# EAGLE board xmosio2_routed (EAGLE 7.6.0), part 1 of 2
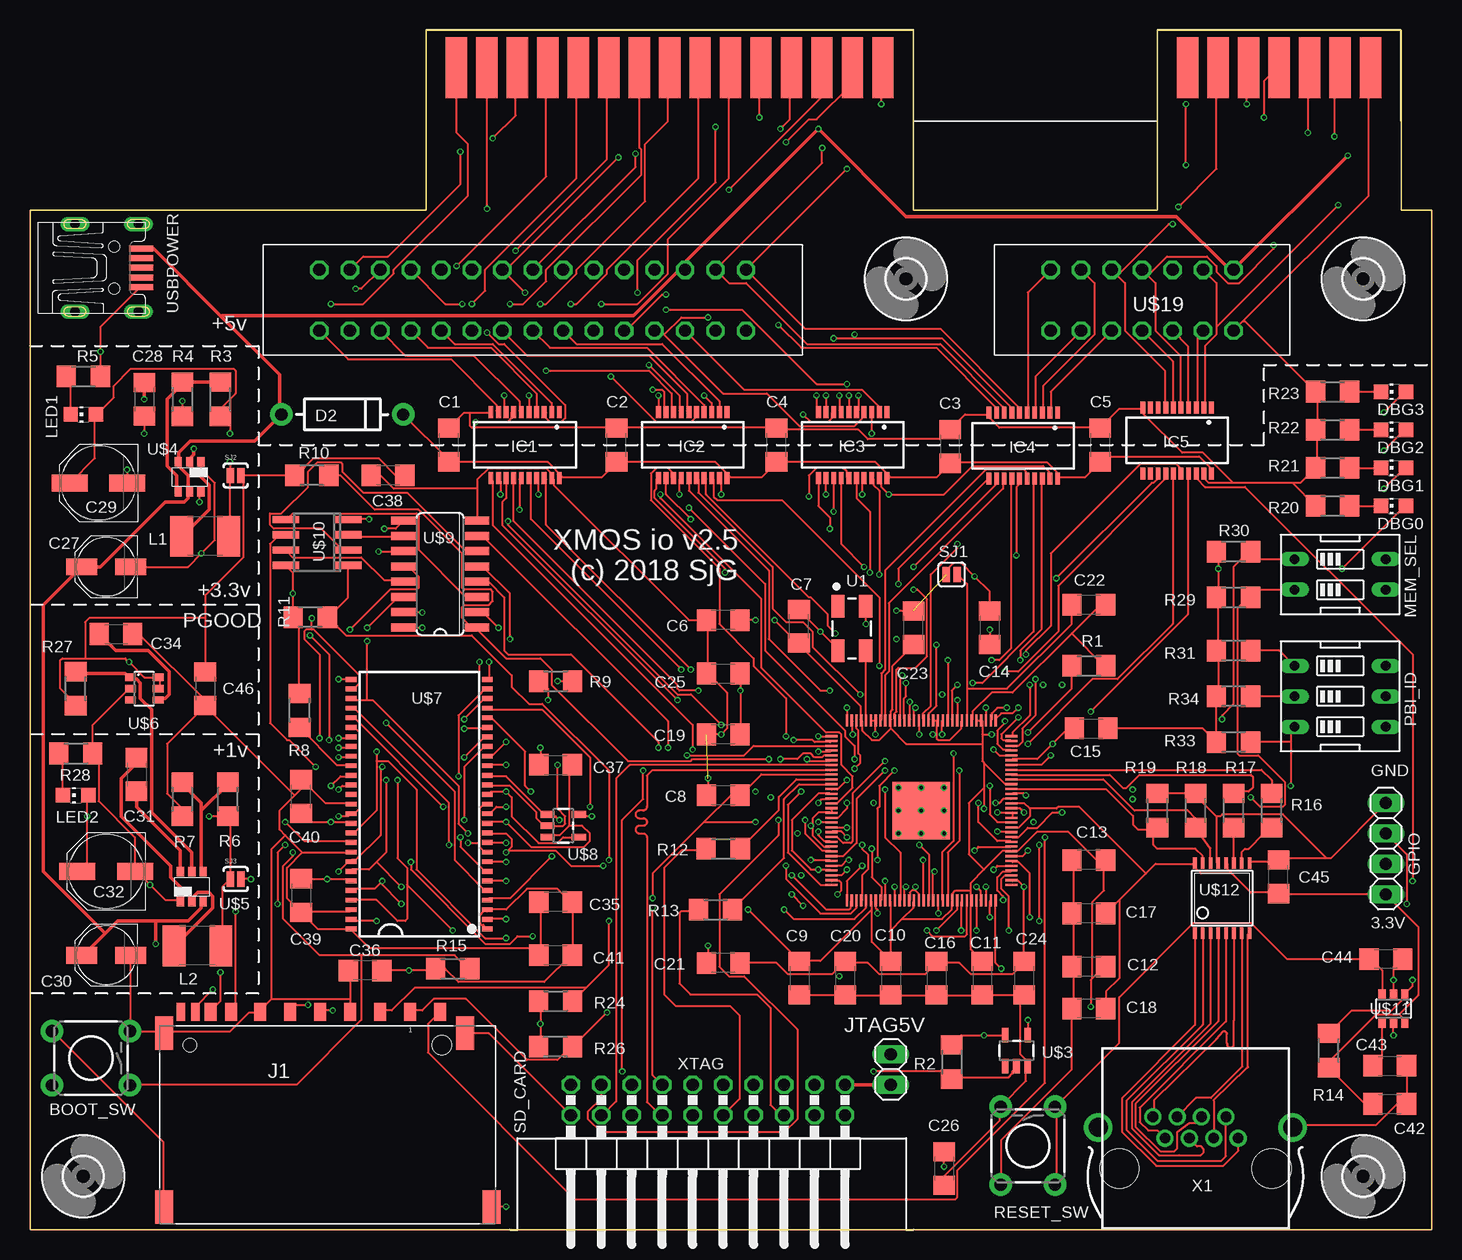
[diagram p0: board, top side]
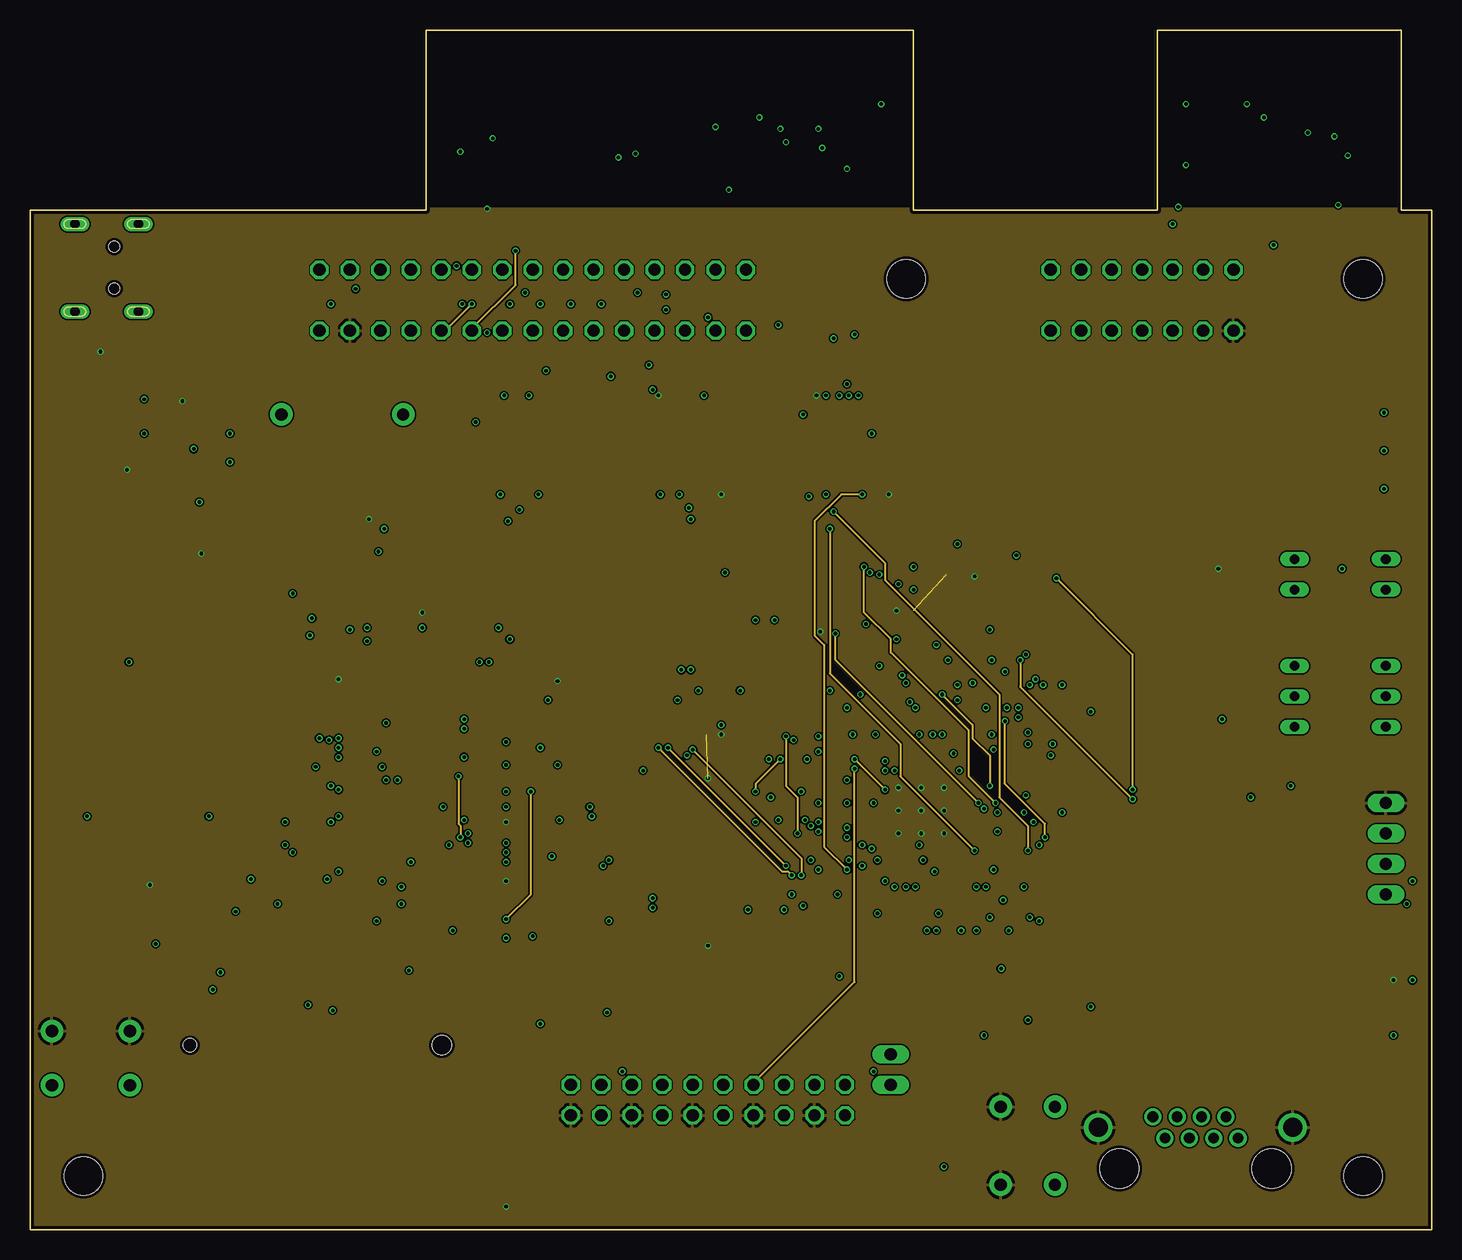
[diagram p1: board, inner layer Route2]
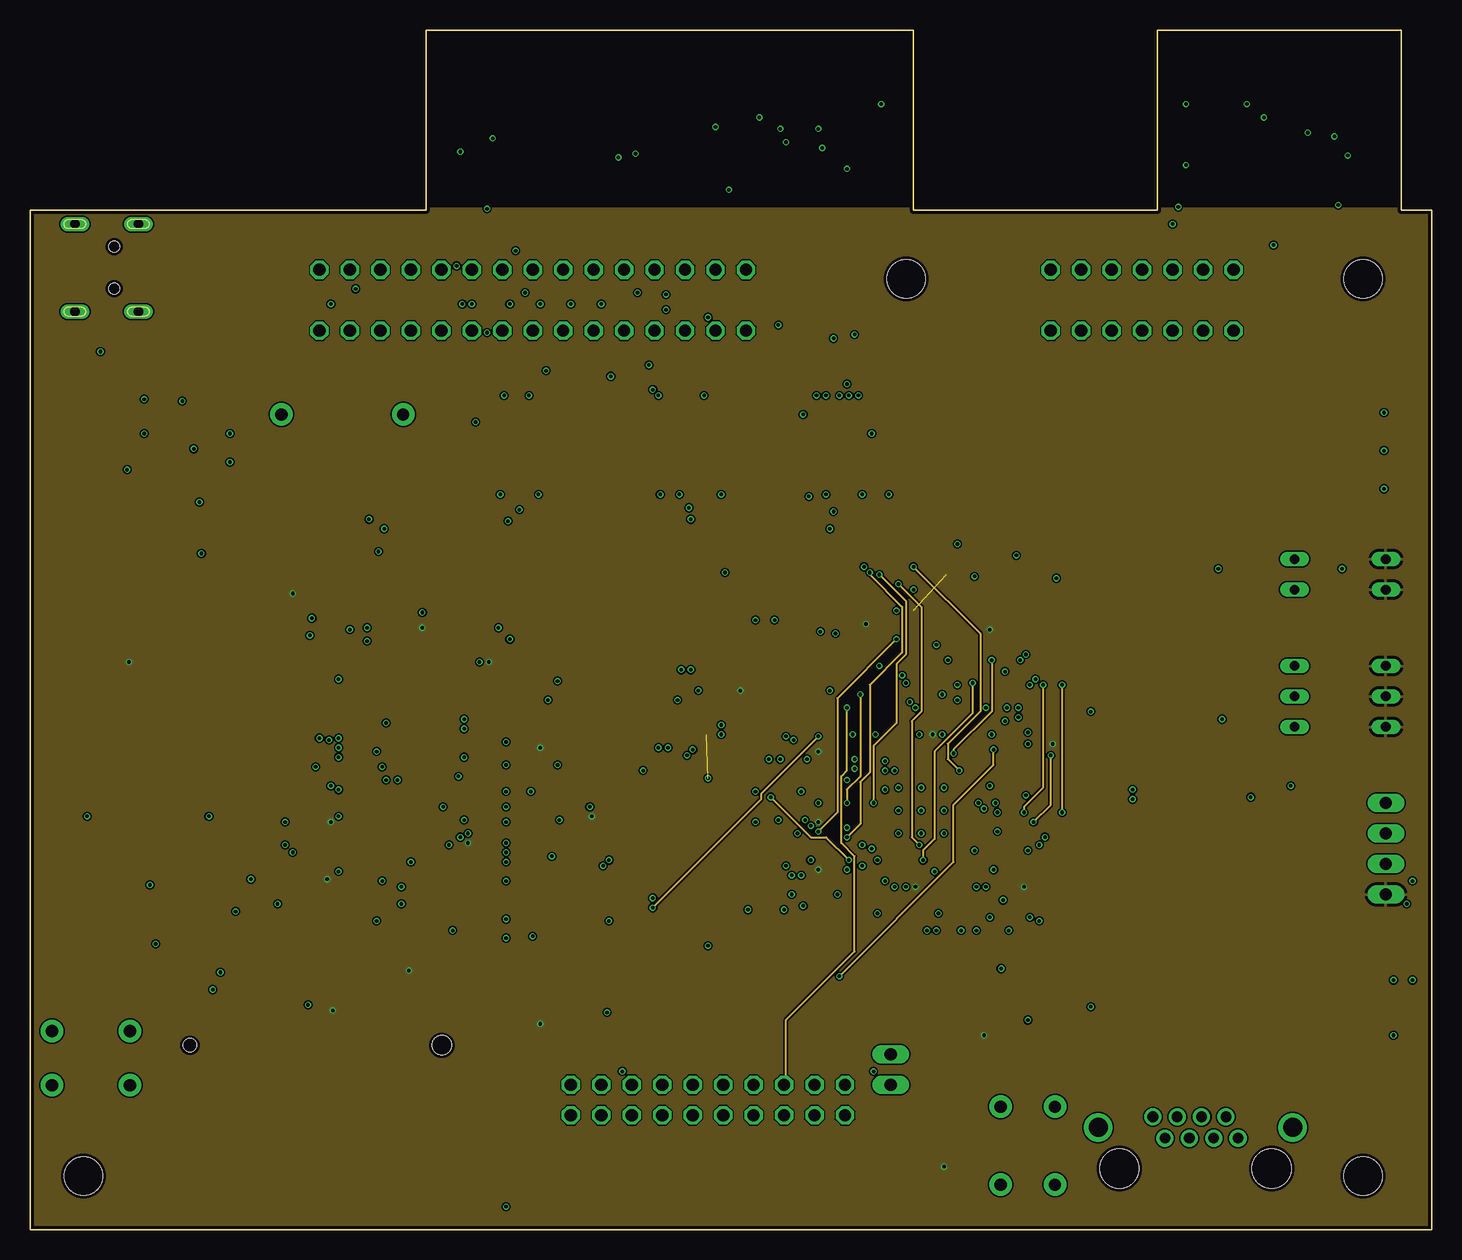
[diagram p2: board, inner layer Route15]
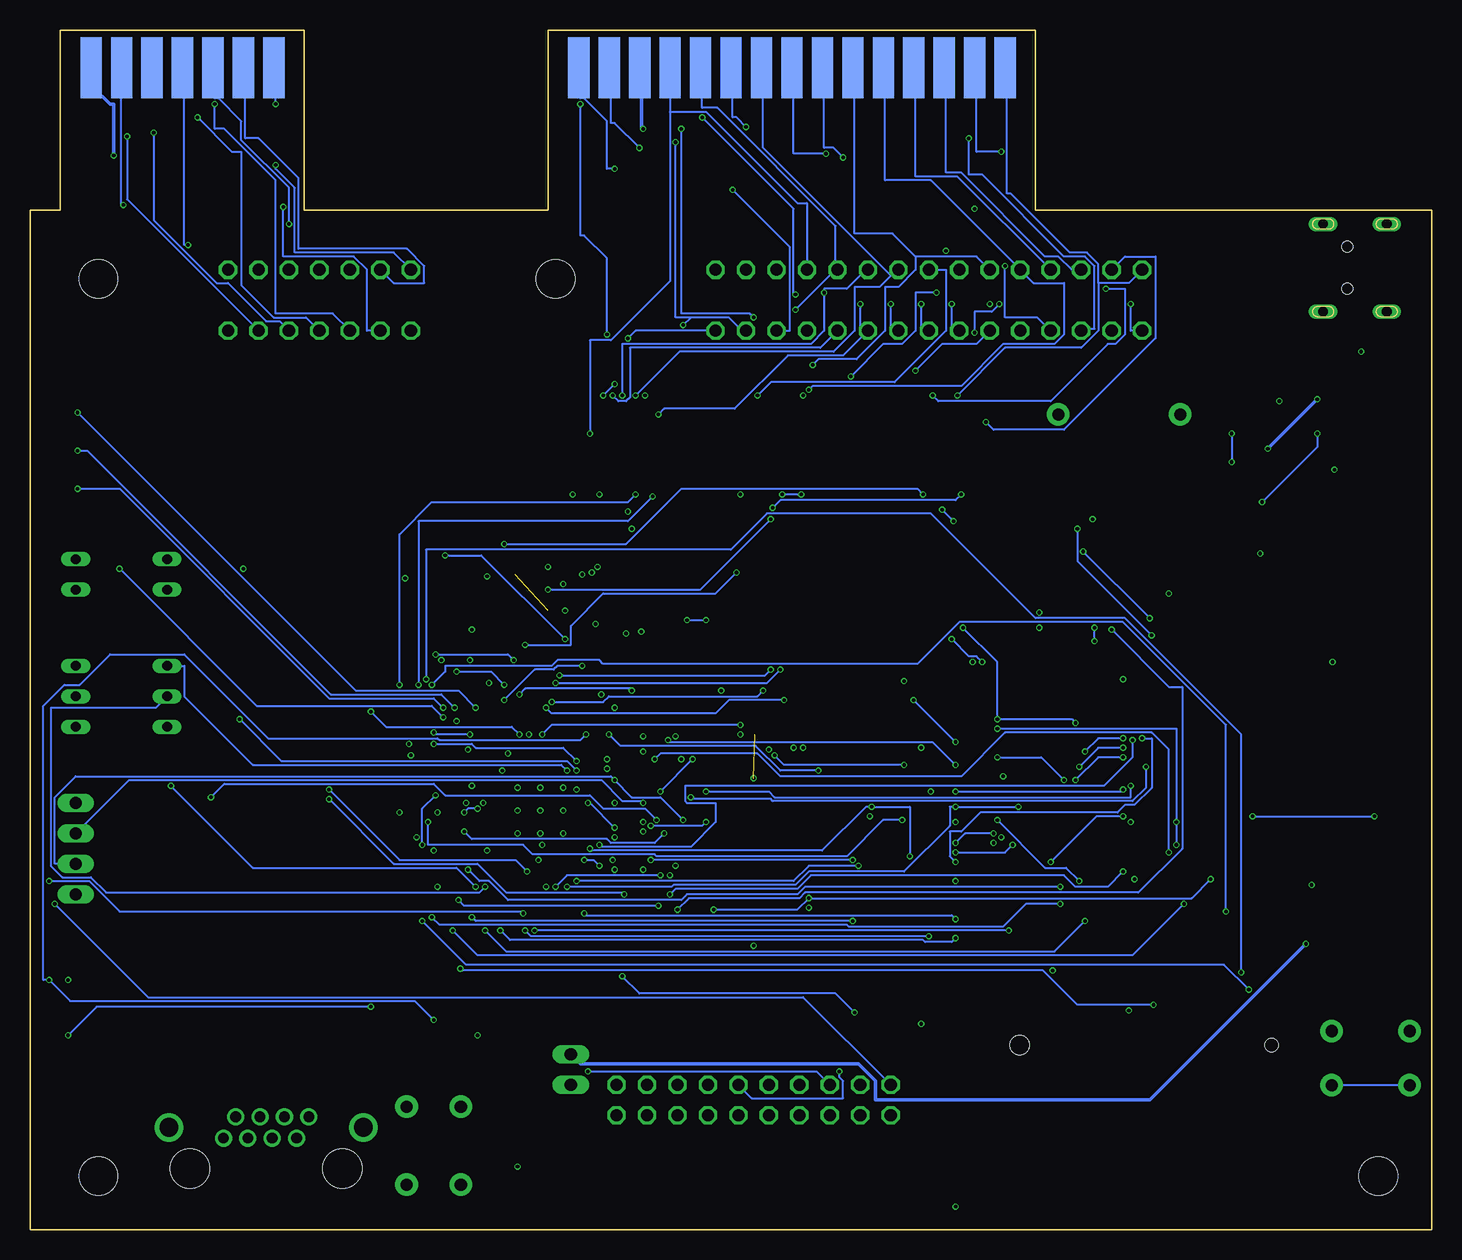
[diagram p3: board, bottom side, seen from below]

Size 116.84 x 100 mm. Coordinates in mm from the lower left corner, seen from the top.
Outline: 0,85 33.02,85 33.02,100 73.66,100 73.66,85 93.98,85 93.98,100 114.3,100 114.3,85 116.84,85 116.84,0 0,0 0,85
Copper layers (1*2*15*16): Top 0.035mm / dielectric 0.2mm / Route2 0.0175mm / dielectric 0.3mm / Route15 0.0175mm / dielectric 0.2mm / Bottom 0.035mm
Design rules "SeeedStudio_4layer_DRU_no_angle_20140221 *": minimum track width 6mil, minimum drill 12mil, track to track 5mil, track to pad 5mil, pad to pad 8mil, via to via 6mil, smd to smd 0mil, copper to edge 10mil, drill to drill 12mil, minimum pad ring 6mil, minimum via ring 4mil, stop-mask expansion 4mil, vias tented up to drill 25mil, thermal gap 10mil
Net classes: 1 Power: width 0.305 mm, drill 0.203 mm, clearance 0.203 mm
tRestrict: area 68,47.3 to 69.1,52.9
bRestrict: area 68,47.3 to 69.1,52.9
vRestrict: area 81,28.3 to 82.5,41.6; area 67.6,26.7 to 80.6,28.3; area 66,28.3 to 67.6,41.6; area 67.6,41.6 to 81,43.2; area 36.8,24.1 to 39.4,47; area 26,24.1 to 28.6,47; area 29.8,48.9 to 32.4,59.7; area 36.2,48.9 to 38.7,59.7; area 95.9,29.2 to 102.9,31.8; area 95.9,24.1 to 102.9,26; area 37.5,66.7 to 45.1,69.2; area 51.4,66.7 to 59.1,69.2; 15 more areas

## Footprints (pad centres in the part's own frame; a part is rotated, then mirrored left to right if it is on the bottom)
TACTILE-PTH = drill 1.016 pad 1.88: 1 -3.251,2.261; 2 3.251,2.261; 3 -3.251,-2.261; 4 3.251,-2.261
C1206 = smd 1.6 x 1.8: 1 -1.4,0; 2 1.4,0
PANASONIC_C = smd 2.6 x 1.4: + 2.05,0; - -2.05,0
PANASONIC_D = smd 3 x 1.4: + 2.4,0; - -2.4,0
DIODE-1N4001-KIT = drill 1.016 pad 1.88: A -5.08,0; C 5.08,0
CHIP-LED0805 = smd 1.2 x 1.2: A 0,-1.05; C 0,1.05
1X04 = drill 1.016 long: 1 -3.81,0; 2 -1.27,0; 3 1.27,0; 4 3.81,0
3,2 = hole 3.2: 0,0
QSOP20 = smd 0.4 x 1: 1 -2.858,-2.75; 2 -2.223,-2.75; 3 -1.588,-2.75; 4 -0.953,-2.75; 5 -0.318,-2.75; 6 0.318,-2.75; 7 0.953,-2.75; 8 1.588,-2.75; 9 2.223,-2.75; 10 2.858,-2.75; 11 2.858,2.75; 12 2.223,2.75; 13 1.588,2.75; 14 0.953,2.75; 15 0.318,2.75; 16 -0.318,2.75; 17 -0.953,2.75; 18 -1.588,2.75; 19 -2.223,2.75; 20 -2.858,2.75
693063020911 = smd 1 x 1.5: 1 6.875,0; 2 4.375,0; 3 1.875,0; 4 -0.625,0; 5 -3.125,0; 6 -5.625,0; 7 -8.05,0; 8 -9.75,0; 9 9.375,0 | smd 0.7 x 1.5: CD -11.05,0; WP -12.25,0 | smd 1.5 x 2.8: GND1 -13.65,-1.8; GND2 11.45,-1.8; GND3 13.65,-16.3; GND4 -13.65,-16.3 | hole 1.1: -11.5,-2.8 | hole 1.6: 9.5,-2.8
1X02 = drill 1.016 long: 1 -1.27,0; 2 1.27,0
L1812 = smd 1.9 x 3.4: 1 -1.95,0; 2 1.95,0
EDG-02 = drill 0.813 long: 1 -1.27,-3.81; 2 1.27,-3.81; 3 1.27,3.81; 4 -1.27,3.81
EDG-03 = drill 0.813 long: 1 -2.54,-3.81; 2 0,-3.81; 3 2.54,-3.81; 4 2.54,3.81; 5 0,3.81; 6 -2.54,3.81
R1206 = smd 1.6 x 1.803: 1 -1.422,0; 2 1.422,0
SJ_2S = smd 0.635 x 1.27: 1 -0.45,0; 2 0.45,0
SJ_2S-NO = smd 0.635 x 1.27: 1 -0.45,0; 2 0.45,0
CRYSTAL-OSC-SMD-5X3 = smd 1.9 x 1.1: 1 -1.85,-1.15; 2 1.85,-1.15; 3 1.85,1.15; 4 -1.85,1.15
ECL_CART = smd 1.778 x 5.08: P$1 2.54,4.445; P$2 5.08,4.445; P$3 7.62,4.445; P$4 10.16,4.445; P$5 12.7,4.445; P$6 15.24,4.445; P$7 17.78,4.445; P$8 20.32,4.445; P$9 22.86,4.445; P$10 25.4,4.445; P$11 27.94,4.445; P$12 30.48,4.445; P$13 33.02,4.445; P$14 35.56,4.445; P$15 38.1,4.445; P$38 63.5,4.445; P$39 66.04,4.445; P$40 68.58,4.445; P$41 71.12,4.445; P$42 73.66,4.445; P$43 76.2,4.445; P$44 78.74,4.445 | smd 1.778 x 5.08 bottom: P$16 2.54,4.445; P$17 5.08,4.445; P$18 7.62,4.445; P$19 10.16,4.445; P$20 12.7,4.445; P$21 15.24,4.445; P$22 17.78,4.445; P$23 20.32,4.445; P$24 22.86,4.445; P$25 25.4,4.445; P$26 27.94,4.445; P$27 30.48,4.445; P$28 33.02,4.445; P$29 35.56,4.445; P$30 38.1,4.445; P$31 63.5,4.445; P$32 66.04,4.445; P$33 68.58,4.445; P$34 71.12,4.445; P$35 73.66,4.445; P$36 76.2,4.445; P$37 78.74,4.445
TQFP128 = smd 1 x 0.18: 1 -7.5,6.2; 2 -7.5,5.8; 3 -7.5,5.4; 4 -7.5,5; 5 -7.5,4.6; 6 -7.5,4.2; 7 -7.5,3.8; 8 -7.5,3.4; 9 -7.5,3; 10 -7.5,2.6; 11 -7.5,2.2; 12 -7.5,1.8; 13 -7.5,1.4; 14 -7.5,1; 15 -7.5,0.6; 16 -7.5,0.2; 17 -7.5,-0.2; 18 -7.5,-0.6; 19 -7.5,-1; 20 -7.5,-1.4; 21 -7.5,-1.8; 22 -7.5,-2.2; 23 -7.5,-2.6; 24 -7.5,-3; 25 -7.5,-3.4; 26 -7.5,-3.8; 27 -7.5,-4.2; 28 -7.5,-4.6; 29 -7.5,-5; 30 -7.5,-5.4; 31 -7.5,-5.8; 32 -7.5,-6.2; 65 7.5,-6.2; 66 7.5,-5.8; 67 7.5,-5.4; 68 7.5,-5; 69 7.5,-4.6; 70 7.5,-4.2; 71 7.5,-3.8; 72 7.5,-3.4; 73 7.5,-3; 74 7.5,-2.6; 75 7.5,-2.2; 76 7.5,-1.8; 77 7.5,-1.4; 78 7.5,-1; 79 7.5,-0.6; 80 7.5,-0.2; 81 7.5,0.2; 82 7.5,0.6; 83 7.5,1; 84 7.5,1.4; 85 7.5,1.8; 86 7.5,2.2; 87 7.5,2.6; 88 7.5,3; 89 7.5,3.4; 90 7.5,3.8; 91 7.5,4.2; 92 7.5,4.6; 93 7.5,5; 94 7.5,5.4; 95 7.5,5.8; 96 7.5,6.2 | smd 0.18 x 1: 33 -6.2,-7.5; 34 -5.8,-7.5; 35 -5.4,-7.5; 36 -5,-7.5; 37 -4.6,-7.5; 38 -4.2,-7.5; 39 -3.8,-7.5; 40 -3.4,-7.5; 41 -3,-7.5; 42 -2.6,-7.5; 43 -2.2,-7.5; 44 -1.8,-7.5; 45 -1.4,-7.5; 46 -1,-7.5; 47 -0.6,-7.5; 48 -0.2,-7.5; 49 0.2,-7.5; 50 0.6,-7.5; 51 1,-7.5; 52 1.4,-7.5; 53 1.8,-7.5; 54 2.2,-7.5; 55 2.6,-7.5; 56 3,-7.5; 57 3.4,-7.5; 58 3.8,-7.5; 59 4.2,-7.5; 60 4.6,-7.5; 61 5,-7.5; 62 5.4,-7.5; 63 5.8,-7.5; 64 6.2,-7.5; 97 6.2,7.5; 98 5.8,7.5; 99 5.4,7.5; 100 5,7.5; 101 4.6,7.5; 102 4.2,7.5; 103 3.8,7.5; 104 3.4,7.5; 105 3,7.5; 106 2.6,7.5; 107 2.2,7.5; 108 1.8,7.5; 109 1.4,7.5; 110 1,7.5; 111 0.6,7.5; 112 0.2,7.5; 113 -0.2,7.5; 114 -0.6,7.5; 115 -1,7.5; 116 -1.4,7.5; 117 -1.8,7.5; 118 -2.2,7.5; 119 -2.6,7.5; 120 -3,7.5; 121 -3.4,7.5; 122 -3.8,7.5; 123 -4.2,7.5; 124 -4.6,7.5; 125 -5,7.5; 126 -5.4,7.5; 127 -5.8,7.5; 128 -6.2,7.5 | smd 4.8 x 4.8: PAD 0,0
SOT23-5 = smd 0.55 x 1.2: 1 -0.95,-1.3; 2 0,-1.3; 3 0.95,-1.3; 4 0.95,1.3; 5 -0.95,1.3
TSOT23-6_DDC = smd 0.6 x 0.8: 1 -0.95,-1.25; 2 0,-1.25; 3 0.95,-1.25; 4 0.95,1.25; 5 0,1.25; 6 -0.95,1.25
SOT23-6 = smd 0.6 x 0.9: 1 -0.95,-1.15; 2 0,-1.15; 3 0.95,-1.15; 4 0.95,1.15; 5 0,1.15; 6 -0.95,1.15
TSOP54-400 = smd 0.4 x 0.9: 1 -10.4,-5.68; 2 -9.6,-5.68; 3 -8.8,-5.68; 4 -8,-5.68; 5 -7.2,-5.68; 6 -6.4,-5.68; 7 -5.6,-5.68; 8 -4.8,-5.68; 9 -4,-5.68; 10 -3.2,-5.68; 11 -2.4,-5.68; 12 -1.6,-5.68; 13 -0.8,-5.68; 14 0,-5.68; 15 0.8,-5.68; 16 1.6,-5.68; 17 2.4,-5.68; 18 3.2,-5.68; 19 4,-5.68; 20 4.8,-5.68; 21 5.6,-5.68; 22 6.4,-5.68; 23 7.2,-5.68; 24 8,-5.68; 25 8.8,-5.68; 26 9.6,-5.68; 27 10.4,-5.68; 28 10.4,5.68; 29 9.6,5.68; 30 8.8,5.68; 31 8,5.68; 32 7.2,5.68; 33 6.4,5.68; 34 5.6,5.68; 35 4.8,5.68; 36 4,5.68; 37 3.2,5.68; 38 2.4,5.68; 39 1.6,5.68; 40 0.8,5.68; 41 0,5.68; 42 -0.8,5.68; 43 -1.6,5.68; 44 -2.4,5.68; 45 -3.2,5.68; 46 -4,5.68; 47 -4.8,5.68; 48 -5.6,5.68; 49 -6.4,5.68; 50 -7.2,5.68; 51 -8,5.68; 52 -8.8,5.68; 53 -9.6,5.68; 54 -10.4,5.68
SO16 = smd 0.66 x 2.032: 1 -4.445,-3.073; 2 -3.175,-3.073; 3 -1.905,-3.073; 4 -0.635,-3.073; 5 0.635,-3.073; 6 1.905,-3.073; 7 3.175,-3.073; 8 4.445,-3.073; 9 4.445,3.073; 10 3.175,3.073; 11 1.905,3.073; 12 0.635,3.073; 13 -0.635,3.073; 14 -1.905,3.073; 15 -3.175,3.073; 16 -4.445,3.073
SO-08 = smd 0.6 x 2.2: 1 -1.905,-2.6; 2 -0.635,-2.6; 3 0.635,-2.6; 4 1.905,-2.6; 5 1.905,2.6; 6 0.635,2.6; 7 -0.635,2.6; 8 -1.905,2.6
TSSOP16 = smd 0.305 x 0.991: 1 -2.275,-2.918; 2 -1.625,-2.918; 3 -0.975,-2.918; 4 -0.325,-2.918; 5 0.325,-2.918; 6 0.975,-2.918; 7 1.625,-2.918; 8 2.275,-2.918; 9 2.275,2.918; 10 1.625,2.918; 11 0.975,2.918; 12 0.325,2.918; 13 -0.325,2.918; 14 -0.975,2.918; 15 -1.625,2.918; 16 -2.275,2.918
XE_SLOT = drill 1.016 octagon: 1 -2.54,41.91; 2 2.54,41.91; 3 -2.54,39.37; 4 2.54,39.37; 5 -2.54,36.83; 6 2.54,36.83; 7 -2.54,34.29; 8 2.54,34.29; 9 -2.54,31.75; 10 2.54,31.75; 11 -2.54,29.21; 12 2.54,29.21; 13 -2.54,26.67; 14 2.54,26.67; 15 -2.54,24.13; 16 2.54,24.13; 17 -2.54,21.59; 18 2.54,21.59; 19 -2.54,19.05; 20 2.54,19.05; 21 -2.54,16.51; 22 2.54,16.51; 23 -2.54,13.97; 24 2.54,13.97; 25 -2.54,11.43; 26 2.54,11.43; 27 -2.54,8.89; 28 2.54,8.89; 29 -2.54,6.35; 30 2.54,6.35; 31 -2.54,-19.05; 32 2.54,-19.05; 33 -2.54,-21.59; 34 2.54,-21.59; 35 -2.54,-24.13; 36 2.54,-24.13; 37 -2.54,-26.67; 38 2.54,-26.67; 39 -2.54,-29.21; 40 2.54,-29.21; 41 -2.54,-31.75; 42 2.54,-31.75; 43 -2.54,-34.29; 44 2.54,-34.29
UX60-MB-5S8 = smd 2 x 0.5: 1 8.65,1.6; 2 8.65,0.8; 3 8.65,0; 4 8.65,-0.8; 5 8.65,-1.6 | drill 0.8 long: M1 3.1,-3.65; M2 3.1,3.65; M3 8.4,3.65; M4 8.4,-3.65 | hole 0.9: 6.4,-1.75; 6.4,1.75
0446200002 = drill 0.889 pad 1.422: 1 3.556,2.54; 2 2.54,4.318; 3 1.524,2.54; 4 0.508,4.318; 5 -0.508,2.54; 6 -1.524,4.318; 7 -2.54,2.54; 8 -3.556,4.318 | drill 1.575 pad 2.286: S@1 -8.103,3.429; S@2 8.103,3.429 | hole 3.251: 6.35,0; -6.35,0
2X10/90 = drill 1.016 octagon: 1 -11.43,-6.35; 2 -11.43,-3.81; 3 -8.89,-6.35; 4 -8.89,-3.81; 5 -6.35,-6.35; 6 -6.35,-3.81; 7 -3.81,-6.35; 8 -3.81,-3.81; 9 -1.27,-6.35; 10 -1.27,-3.81; 11 1.27,-6.35; 12 1.27,-3.81; 13 3.81,-6.35; 14 3.81,-3.81; 15 6.35,-6.35; 16 6.35,-3.81; 17 8.89,-6.35; 18 8.89,-3.81; 19 11.43,-6.35; 20 11.43,-3.81

## Placement (x,y rotation side)
BOOT_SW  FLASH_MODE  [TACTILE-PTH]  5.08,14.29 180 top
C1  100nF  [C1206]  34.92,65.41 90 top
C2  100nF  [C1206]  48.9,65.41 90 top
C3  100nF  [C1206]  76.71,65.28 90 top
C4  100nF  [C1206]  62.23,65.41 90 top
C5  100nF  [C1206]  89.22,65.41 90 top
C6  100nF  [C1206]  57.78,50.8 180 top
C7  100nF  [C1206]  64.1,50.29 90 top
C8  100nF  [C1206]  57.78,36.2 180 top
C9  100nF  [C1206]  64.14,20.95 270 top
C10  100nF  [C1206]  71.75,20.95 270 top
C11  100nF  [C1206]  79.38,20.95 270 top
C12  100nF  [C1206]  88.27,21.91 180 top
C13  100nF  [C1206]  88.27,30.8 180 top
C14  100nF  [C1206]  80.01,50.16 90 top
C15  100nF  [C1206]  88.46,41.78 0 top
C16  100nF  [C1206]  75.56,20.95 270 top
C17  100nF  [C1206]  88.27,26.35 180 top
C18  100nF  [C1206]  88.27,18.41 180 top
C19  100nF  [C1206]  57.78,41.27 180 top
C20  100nF  [C1206]  67.94,20.95 270 top
C21  100nF  [C1206]  57.78,22.23 180 top
C22  100nF  [C1206]  88.27,52.07 180 top
C23  10uF  [C1206]  73.66,50.16 90 top
C24  10uF  [C1206]  82.87,20.95 270 top
C25  10nF  [C1206]  57.78,46.35 0 top
C26  100nF  [C1206]  76.2,5.08 270 top
C27  22uF  [PANASONIC_C]  6.35,55.24 180 top
C28  100nF  [C1206]  9.53,69.22 270 top
C29  47uF  [PANASONIC_D]  5.71,62.23 180 top
C30  22uF  [PANASONIC_C]  6.35,22.86 180 top
C31  100nF  [C1206]  8.89,37.94 270 top
C32  47uF  [PANASONIC_D]  6.35,29.84 180 top
C34  120pF  [C1206]  7.17,49.65 0 top
C35  100nF  [C1206]  43.81,27.3 180 top
C36  100nF  [C1206]  27.94,21.59 180 top
C37  100nF  [C1206]  43.81,38.73 0 top
C38  100nF  [C1206]  29.84,62.87 180 top
C39  100nF  [C1206]  22.61,27.84 270 top
C40  100nF  [C1206]  22.61,36.1 90 top
C41  100nF  [C1206]  43.81,22.86 180 top
C42  100nF  [C1206]  113.35,10.48 0 top
C43  120pF  [C1206]  113.35,13.65 0 top
C44  10nF  [C1206]  113.03,22.54 180 top
C45  100nF  [C1206]  104.08,29.4 90 top
C46  100nF  [C1206]  14.61,45.09 270 top
D2  [DIODE-1N4001-KIT]  26.04,67.94 0 top
DBG0  ok33  [CHIP-LED0805]  113.67,60.33 90 top
DBG1  ok33  [CHIP-LED0805]  113.67,63.5 90 top
DBG2  ok33  [CHIP-LED0805]  113.67,66.67 90 top
DBG3  ok33  [CHIP-LED0805]  113.67,69.85 90 top
GPIO  UART  [1X04]  113.03,31.75 270 top
H1  MOUNT-HOLE3.2  [3,2]  111.12,4.45 0 top
H2  MOUNT-HOLE3.2  [3,2]  111.12,79.25 0 top
H3  MOUNT-HOLE3.2  [3,2]  73.03,79.25 0 top
H4  MOUNT-HOLE3.2  [3,2]  4.45,4.45 0 top
IC1  IDTQS3245QSOP20  [QSOP20]  41.27,65.41 180 top
IC2  IDTQS3245QSOP20  [QSOP20]  55.24,65.41 180 top
IC3  IDTQS3245QSOP20  [QSOP20]  68.58,65.41 180 top
IC4  IDTQS3245QSOP20  [QSOP20]  82.8,65.34 180 top
IC5  IDTQS3245QSOP20  [QSOP20]  95.63,65.79 180 top
J1  SD_CARD  [693063020911]  24.83,18.16 0 top
JTAG5V  PSU  [1X02]  71.75,13.34 270 top
L1  2.2uH  [L1812]  14.61,57.78 180 top
L2  2.2uH  [L1812]  13.97,23.65 180 top
LED1  ok33  [CHIP-LED0805]  4.45,67.94 90 top
LED2  ok33  [CHIP-LED0805]  3.81,36.2 90 top
MEM_SEL  CT2092MS-ND  [EDG-02]  109.22,54.61 270 top
PBI_ID  CT2093MS-ND  [EDG-03]  109.22,44.45 270 top
R1  4R7  [R1206]  88.27,46.99 180 top
R2  47K  [R1206]  76.83,13.97 90 top
R3  34K  [R1206]  15.88,69.22 270 top
R4  10K  [R1206]  12.7,69.22 90 top
R5  180R  [R1206]  4.45,71.12 180 top
R6  5K1  [R1206]  16.51,35.88 270 top
R7  16K  [R1206]  12.7,35.88 90 top
R8  10K  [R1206]  22.48,43.28 270 top
R9  10K  [R1206]  43.81,45.72 180 top
R10  10K  [R1206]  23.5,62.87 0 top
R11  10K  [R1206]  23.37,51.05 0 top
R12  33R  [R1206]  57.78,31.75 180 top
R13  33R  [R1206]  57.15,26.67 180 top
R14  47K  [R1206]  108.27,14.92 270 top
R15  10K  [R1206]  35.24,21.75 180 top
R16  0R  [R1206]  103.5,34.92 270 top
R17  0R  [R1206]  100.33,34.92 270 top
R18  47K  [R1206]  97.16,34.92 270 top
R19  47K  [R1206]  93.98,34.92 270 top
R20  1K  [R1206]  108.58,60.33 180 top
R21  1K  [R1206]  108.58,63.5 180 top
R22  1K  [R1206]  108.58,66.67 180 top
R23  1K  [R1206]  108.58,69.85 180 top
R24  10K  [R1206]  43.81,19.05 180 top
R26  10K  [R1206]  43.81,15.24 0 top
R27  47K  [R1206]  3.81,45.09 270 top
R28  47R  [R1206]  3.81,39.69 180 top
R29  10K  [R1206]  100.33,52.7 180 top
R30  10K  [R1206]  100.33,56.52 0 top
R31  10K  [R1206]  100.33,48.26 0 top
R33  10K  [R1206]  100.33,40.64 0 top
R34  10K  [R1206]  100.33,44.45 0 top
RESET_SW  MANUAL_RESET  [TACTILE-PTH]  83.19,6.99 270 top
SJ1  SOLDERJUMPERNC  [SJ_2S]  76.83,54.61 0 top
SJ2  SOLDERJUMPERNO  [SJ_2S-NO]  17.14,62.87 0 top
SJ3  SOLDERJUMPERNO  [SJ_2S-NO]  17.14,29.21 0 top
U1  24 MHz Osc. (F535L-24)  [CRYSTAL-OSC-SMD-5X3]  68.52,50.1 270 top
U$1  ECL_CART  [ECL_CART]  33,92.4 0 top
U$2  XL216-512-TQ128  [TQFP128]  74.3,34.92 0 top
U$3  74LVC1G07SE-7  [SOT23-5]  82.23,14.92 0 top
U$4  TPS561208DDCR  [TSOT23-6_DDC]  13.3,62.73 180 top
U$5  TPS561208DDCR  [TSOT23-6_DDC]  13.49,28.57 0 top
U$6  TPS3808G33DBVR  [SOT23-6]  9.53,45.09 270 top
U$7  W9852G6KH  [TSOP54-400]  32.45,35.46 90 top
U$8  SN74LVC1G02  [SOT23-5]  44.45,33.66 270 top
U$9  SN74CBTLV3257  [SO16]  34.19,54.64 90 top
U$10  IS25LP080D-JNLE  [SO-08]  23.94,57.28 90 top
U$11  TPS3808G09DBVR  [SOT23-6]  113.67,18.41 180 top
U$12  FIN1049MTCX  [TSSOP16]  99.38,27.62 0 top
U$19  XE_SLOT  [XE_SLOT]  66.04,77.47 90 top
USBPOWER  MINI-USB-UX60-MB-5S8  [UX60-MB-5S8]  0.64,80.17 0 top
X1  0446200002  [0446200002]  97.16,5.08 0 top
XTAG  1175-1618-ND  [2X10/90]  56.52,5.71 180 top

## Library data of the parts
BOOT_SW RESET_SW SJ1-SJ3 U1 = SparkFun
C1-C32 C34-C46 L1 L2 R1-R24 R26-R31 R33 R34 = rcl
D2 = SparkFun-DiscreteSemi
DBG0 DBG1-DBG3 LED1 LED2 = led
GPIO JTAG5V XTAG = pinhead
H1-H4 = holes
IC1-IC5 = IDTQS_3245QG
J1 = InputOutputIO (rev17e)
MEM_SEL PBI_ID = special
U$1 = atari
U$2 = Eagle_XMOS_Lib_COMPLETE
U$3 U$8 U$9 = sjg-logic
U$4-U$6 U$11 = sjg-power
U$7 = sjg-sdram
U$10 = sjg-qspi
U$12 = sjg-isolation
U$19 = pbxl
USBPOWER = con-hirose; OC_FARNELL: unknown; OC_NEWARK: unknown
X1 = con-molex; MF: MOLEX; MPN: 0446200002; OC_FARNELL: 9251910

## Nets
!QSPI_CS!: R11.2 U$2.27 U$10.1
!RESET!: R14.1 U$2.122 U$2.123 U$3.4 U$11.1
!SD_CAS!: U$2.90 U$7.17 U$8.1
!SD_ENABLE!: R10.2 U$2.32 U$9.1
!SD_RAS!: U$2.2 U$7.18
!SD_WE!: U$2.3 U$7.16 U$8.2
!X_CCTL!: IC4.14 U$2.53
!X_D1XX!: IC5.13 U$2.51
!X_EXSEL!: IC4.15 U$2.23
!X_HALT!: IC4.18 U$2.31
!X_IRQ!: IC4.16 U$2.121
!X_MPD!: IC5.15 U$2.22
!X_REF!: IC5.18 U$2.52
!X_RST!: IC4.17 U$2.49
!X_S4!: IC1.12 U$2.44
!X_S5!: IC3.17 U$2.30
+4.3V: C1.1 C2.1 C3.1 C4.1 C5.1 D2.C IC1.20 IC2.20 IC3.20 IC4.20 IC5.20
+5V [Power]: C27.+ C30.+ D2.A JTAG5V.1 U$1.P$28 U$1.P$37 U$4.3 U$4.5 U$5.3 U$19.26 U$19.44 USBPOWER.1
B1: IC1.9 U$1.P$1 U$19.1
B2: IC1.8 U$1.P$16 U$19.2
B3: IC1.7 U$1.P$17 U$19.4
B4: IC1.6 U$1.P$3 U$19.5
B5: IC1.5 U$1.P$18 U$19.6
B6: IC1.4 U$1.P$4 U$19.7
B7: IC1.3 U$1.P$19 U$19.8
B8: IC1.2 U$1.P$5 U$19.9
B9: IC2.9 U$1.P$20 U$19.10
B10: IC2.8 U$1.P$6 U$19.11
B11: IC2.7 U$1.P$21 U$19.12
B12: IC2.6 U$1.P$7 U$19.13
B13: IC2.5 U$1.P$22 U$19.14
B14: IC2.4 U$1.P$8 U$19.15
B15: IC2.3 U$1.P$23 U$19.16
B16: IC2.2 U$1.P$9 U$19.17
B17: IC3.9 U$1.P$24 U$19.18
B18: IC3.8 U$1.P$10 U$19.19
B19: IC3.7 U$1.P$25 U$19.20
B20: IC3.6 U$1.P$11 U$19.21
B21: IC3.5 U$1.P$26 U$19.22
B22: IC3.4 U$1.P$12 U$19.23
B23: IC3.3 U$1.P$27 U$19.24
B24: IC3.2 U$1.P$13 U$19.25
B25: IC4.9 U$1.P$14 U$19.27
B26: IC4.8 U$1.P$29 U$19.28
B27: IC4.7 U$1.P$15 U$19.29
B28: IC4.6 U$1.P$30 U$19.30
B29: IC4.5 U$1.P$31 U$19.32
B30: IC4.4 U$1.P$39 U$19.33
B31: IC4.3 U$1.P$32 U$19.34
B32: IC4.2 U$1.P$40 U$19.35
B33: IC5.7 U$1.P$33 U$19.36
B34: IC5.6 U$1.P$41 U$19.37
B35: IC5.5 U$1.P$34 U$19.38
B36: IC5.4 U$1.P$42 U$19.39
B37: IC5.3 U$1.P$43 U$19.41
B38: IC5.2 U$1.P$36 U$19.42
DOUT1_N: U$12.8 X1.3
DOUT1_P: U$12.7 X1.6
DOUT2_N: U$12.5 X1.7
DOUT2_P: U$12.6 X1.8
EN_1V0 [Power]: R27.1 U$5.5 U$6.1
GND: BOOT_SW.3 BOOT_SW.4 C1.2 C2.2 C3.2 C4.2 C5.2 C6.2 C7.2 C8.2 C9.2 C10.2 C11.2 C12.2 C13.2 C14.2 C15.2 C16.2 C17.2 C18.2 C19.2 C20.2 C21.2 C23.2 C24.2 C25.1 C26.2 C27.- C29.- C30.- C32.- C34.2 C35.2 C36.2 C37.2 C38.2 C39.2 C40.2 C41.2 C42.2 C43.2 C44.1 C45.2 C46.2 GPIO.1 IC1.10 IC1.19 IC2.10 IC2.19 IC3.10 IC3.19 IC4.10 IC4.19 IC5.10 IC5.19 J1.3 J1.6 J1.GND1 J1.GND2 J1.GND3 J1.GND4 R4.1 R5.1 R7.1 R9.1 R18.1 R19.1 R20.2 R21.2 R22.2 R23.2 R28.1 R29.2 R30.1 R31.1 R33.1 R34.1 RESET_SW.3 RESET_SW.4 SJ1.1 U1.2 U$1.P$2 U$1.P$44 U$2.PAD U$3.3 U$4.1 U$5.1 U$6.2 U$7.6 U$7.12 U$7.28 U$7.41 U$7.46 U$7.52 U$7.54 U$8.3 U$9.8 U$9.15 U$10.4 U$11.2 U$12.9 U$12.13 U$19.3 U$19.43 USBPOWER.5 X1.S@1 X1.S@2 XTAG.4 XTAG.8 XTAG.12 XTAG.16 XTAG.20
JTAG_DN0: U$2.8 XTAG.14
JTAG_DN1: U$2.7 XTAG.18
JTAG_UP0: R12.2 XTAG.10
JTAG_UP1: R13.2 XTAG.6
LED0: DBG0.A U$2.95
LED1: DBG1.A U$2.97
LED2: DBG2.A U$2.98
LED3: DBG3.A U$2.99
LNK_IN0: R18.2 U$2.87 U$12.14
LNK_IN1: R19.2 U$2.85 U$12.15
LNK_OUT0: R17.2 U$12.11
LNK_OUT1: R16.2 U$12.10
N$1: C22.1 R1.1 U$2.102
N$2: U1.3 U$2.124
N$3: C22.2 SJ1.2 U$2.103
N$4: C28.2 U$4.6
N$5: R2.1 U$3.2 XTAG.15
N$6: C43.1 U$11.4
N$7 [Power]: C28.1 L1.2 U$4.2
N$8 [Power]: C31.2 U$5.6
N$9 [Power]: R3.1 R4.2 U$4.4
N$10: LED1.C R5.2
N$11 [Power]: C31.1 L2.2 U$5.2
N$12 [Power]: R6.1 R7.2 U$5.4
N$13 [Power]: C34.1 U$6.4
N$14: U$7.15 U$7.39 U$8.4
N$15: R8.2 U$7.37
N$16: U$9.3 U$10.5
N$17: R9.2 U$7.19
N$18: U$9.6 U$10.2
N$19: U$9.10 U$10.3
N$20: U$9.13 U$10.7
N$22: R12.1 U$2.10
N$23: R13.1 U$2.11
N$24: DBG3.C R23.1
N$25: DBG2.C R22.1
N$26: DBG1.C R21.1
N$27: DBG0.C R20.1
N$28: R17.1 U$2.88
N$29: R16.1 U$2.89
N$30: C29.+ L1.1 LED1.A R3.2 SJ2.1
N$31: LED2.C R28.2
N$32: C32.+ L2.1 LED2.A R6.2 SJ3.1
N$33: BOOT_SW.1 BOOT_SW.2 R15.1 U$2.6
N$34: MEM_SEL.2 R29.1 U$2.25
N$35: MEM_SEL.1 R30.2 U$2.26
N$38 [Power]: JTAG5V.2 XTAG.1
PBI0: PBI_ID.1 R31.2 U$2.33
PBI1: PBI_ID.2 R34.2 U$2.61
PBI2: PBI_ID.3 R33.2 U$2.62
QSPI_CLK: U$2.28 U$10.6
RIN1_N: U$12.1 X1.1
RIN1_P: U$12.2 X1.2
RIN2_N: U$12.4 X1.4
RIN2_P: U$12.3 X1.5
SD_ADQ0: U$2.39 U$7.2 U$7.23
SD_ADQ1: U$2.40 U$7.4 U$7.24
SD_ADQ2: U$7.5 U$7.25 U$9.2
SD_ADQ2/QS_D0: U$2.34 U$9.4
SD_ADQ3: U$7.7 U$7.26 U$9.5
SD_ADQ3/QS_D1: U$2.35 U$9.7
SD_ADQ4: U$7.8 U$7.29 U$9.11
SD_ADQ4/QS_D2: U$2.36 U$9.9
SD_ADQ5: U$7.10 U$7.30 U$9.14
SD_ADQ5/QS_D3: U$2.37 U$9.12
SD_ADQ6: U$2.41 U$7.11 U$7.31
SD_ADQ7: U$2.43 U$7.13 U$7.32
SD_ADQ8: U$2.56 U$7.33 U$7.42
SD_ADQ9: U$2.57 U$7.34 U$7.44
SD_ADQ10: U$2.67 U$7.22 U$7.45
SD_ADQ11: U$2.68 U$7.35 U$7.47
SD_ADQ12: U$2.69 U$7.36 U$7.48
SD_ADQ13: U$2.70 U$7.20 U$7.50
SD_ADQ14: U$2.58 U$7.21 U$7.51
SD_ADQ15: U$2.60 U$7.53
SD_CLK: U$2.5 U$7.38
SDC_CD: J1.CD U$2.84
SDC_CLK: J1.5 U$2.64
SDC_CMD: J1.2 R24.1 U$2.63
SDC_D0: J1.7 U$2.96
SDC_D1: J1.8 U$2.94
SDC_D2: J1.9 U$2.93
SDC_D3: J1.1 R26.2 U$2.92
TCK: U$2.127 XTAG.9
TDI: U$2.128 XTAG.5
TDO: U$2.1 XTAG.13
TMS: U$2.126 XTAG.7
TRST_N: C44.2 RESET_SW.1 RESET_SW.2 U$11.3
UART_RX: GPIO.2 U$2.14 XTAG.19
UART_TX: GPIO.3 U$2.12 XTAG.17
VCCINT: C6.1 C7.1 C8.1 C9.1 C10.1 C11.1 C12.1 C13.1 C23.1 R1.2 SJ3.2 U$2.9 U$2.16 U$2.17 U$2.24 U$2.38 U$2.42 U$2.47 U$2.55 U$2.59 U$2.72 U$2.79 U$2.80 U$2.86 U$2.100 U$2.101 U$2.119 U$2.125 U$11.5
VCCIO: C14.1 C15.1 C16.1 C17.1 C18.1 C19.1 C20.1 C21.1 C24.1 C25.2 C26.1 C35.1 C36.1 C37.1 C38.1 C39.1 C40.1 C41.1 C42.1 C45.1 C46.1 GPIO.4 J1.4 MEM_SEL.3 MEM_SEL.4 PBI_ID.4 PBI_ID.5 PBI_ID.6 R2.2 R8.1 R10.1 R11.1 R14.2 R15.2 R24.2 R26.1 R27.2 SJ2.2 U1.4 U$2.4 U$2.13 U$2.19 U$2.29 U$2.46 U$2.48 U$2.66 U$2.77 U$2.82 U$2.91 U$2.104 U$2.109 U$2.110 U$3.5 U$6.5 U$6.6 U$7.1 U$7.3 U$7.9 U$7.14 U$7.27 U$7.43 U$7.49 U$8.5 U$9.16 U$10.8 U$11.6 U$12.12 U$12.16
X_A0: IC2.11 U$2.111
X_A1: IC1.17 U$2.112
X_A2: IC1.15 U$2.113
X_A3: IC1.13 U$2.114
X_A4: IC1.14 U$2.115
X_A5: IC1.16 U$2.116
X_A6: IC1.18 U$2.117
X_A7: IC2.12 U$2.118
X_A8: IC2.14 U$2.15
X_A9: IC2.16 U$2.18
X_A10: IC3.18 U$2.20
X_A11: IC3.16 U$2.21
X_A12: IC2.18 U$2.105
X_A13: IC5.14 U$2.106
X_A14: IC5.16 U$2.107
X_A15: IC5.17 U$2.108
X_B02: IC4.13 U$2.120
X_D0: IC3.13 U$2.71
X_D1: IC3.11 U$2.73
X_D2: IC2.17 U$2.74
X_D3: IC3.12 U$2.75
X_D4: IC2.13 U$2.76
X_D5: IC2.15 U$2.78
X_D6: IC3.15 U$2.81
X_D7: IC3.14 U$2.83
X_R/!W!: IC4.11 U$2.50
X_RD4: IC1.11 U$2.45
X_RD5: IC4.12 U$2.54

## Tracks (layer width: path | path; a pad name or v marks a point on that pad's centre or on a via)
!QSPI_CS!  (via drill 0.3)
  Top 0.152: v65.09,30.8 66.67,30.8 U$2.27 | v48.26,30.8 48.26,38.26 42.7,43.81 41.59,43.81 40.16,45.24 40.16,46.2 36.83,49.53 26.35,49.53 24.92,50.96 R11.2 24.92,51.12 26.51,52.7 26.51,55.24 U$10.1
  Bottom 0.152: v48.26,30.8 v65.09,30.8
!RESET!  (via drill 0.3)
  Top 0.152: 70.48,42.39 70.17,42.39 U$2.123 | R14.1 110.17,18.26 113.51,18.26 114.46,19.21 114.46,19.53 U$11.1 114.62,19.68 115.25,20.32 v115.25,20.8 | v70.48,41.27 70.48,42.39 | 70.48,42.39 U$2.122 | v83.19,17.46 83.19,16.35 U$3.4
  Bottom 0.152: v70.48,41.27 70.96,40.8 82.71,40.8 82.87,40.96 97,40.96 103.98,47.94 110.17,47.94 112.71,45.4 113.98,45.4 115.73,43.66 115.73,20.8 v115.25,20.8 113.51,19.05 84.77,19.05 v83.19,17.46
!SD_CAS!  (via drill 0.3)
  Top 0.152: U$7.17 38.26,37.78 39.69,37.78 43.02,34.45 U$8.1 43.18,34.45 43.81,34.45 v44.13,34.13 | v85.09,39.53 84.3,38.73 81.92,38.73 U$2.90
  Route15 0.152: v85.09,39.53 85.09,35.4 v83.66,33.97
  Bottom 0.152: v83.66,33.97 83.66,32.07 75.72,32.07 74.93,31.27 64.77,31.27 64.61,31.11 48.74,31.11 45.72,34.13 v44.13,34.13
!SD_ENABLE!  (via drill 0.3)
  Top 0.152: v64.29,36.51 63.18,35.4 63.18,31.43 65.88,28.73 66.67,28.73 U$2.32 | v61.59,39.21 55.24,39.21 55.09,39.05 49.85,39.05 43.5,45.4 43.5,46.67 42.55,47.62 39.69,47.62 37.15,50.16 U$9.1 37.15,50.32 36.67,50.32 36.04,50.96 36.04,51.91 36.2,52.07 38.26,52.07 38.58,52.39 38.58,53.18 38.42,53.34 36.2,53.34 36.04,53.5 36.04,56.36 32.38,60.01 28.73,60.01 25.88,62.87 R10.2
  Bottom 0.152: v61.59,39.21 v64.29,36.51
!SD_RAS!  (via drill 0.3)
  Top 0.152: v39.69,38.73 38.26,38.73 U$7.18 | v63.66,40.8 65.25,40.8 65.41,40.64 66.67,40.64 U$2.2
  Bottom 0.152: v39.69,38.73 41.59,40.64 63.5,40.64 v63.66,40.8
!SD_WE!  (via drill 0.3)
  Top 0.152: U$7.16 38.26,36.99 40.01,36.99 42.23,34.77 42.23,34.29 42.86,33.66 U$8.2 44.45,33.66 44.61,33.81 44.61,34.45 43.97,35.08 v43.97,38.73 | v54.77,39.53 59.53,39.53 60.33,40.32 66.67,40.32 U$2.3
  Bottom 0.152: v54.77,39.53 53.98,38.73 v43.97,38.73
!X_CCTL!  (via drill 0.3)
  Top 0.152: v76.99,39.69 76.99,32.38 76.04,31.43 76.04,27.46 U$2.53 | v80.17,47.47 80.8,47.47 81.76,48.42 81.76,62.55 IC4.14
  Route15 0.152: v76.99,39.69 76.99,40.01 80.17,43.18 v80.17,47.47
!X_D1XX!  (via drill 0.3)
  Top 0.152: v75.41,29.84 75.25,29.69 75.25,27.46 U$2.51 | v85.57,54.29 93.5,62.23 93.66,62.23 93.98,62.55 93.98,63.02 IC5.13
  Route2 0.152: v91.92,36.67 91.92,47.94 v85.57,54.29
  Bottom 0.152: v75.41,29.84 76.36,30.8 86.04,30.8 v91.92,36.67
!X_EXSEL!  (via drill 0.3)
  Top 0.152: v65.72,33.18 65.72,32.86 66.2,32.38 66.67,32.38 U$2.23 | v82.23,56.2 82.23,61.91 82.39,62.07 82.39,62.55 IC4.15
  Route15 0.152: v65.72,33.18 67.31,34.77 67.31,44.29 v72.23,49.21
  Bottom 0.152: v72.23,49.21 79.22,56.2 v82.23,56.2
!X_HALT!  (via drill 0.3)
  Top 0.152: v67.31,27.94 67.63,28.26 67.63,28.89 67.47,29.05 66.83,29.05 U$2.31 | v82.55,47.47 82.55,48.26 84.3,50.01 84.3,62.55 IC4.18
  Route2 0.152: v91.92,35.88 82.55,45.24 v82.55,47.47
  Bottom 0.152: v67.31,27.94 67.47,28.1 77.15,28.1 79.53,30.48 86.52,30.48 v91.92,35.88
!X_IRQ!
  Top 0.152: U$2.121 70.96,42.55 70.96,46.35 71.28,46.67 71.28,54.93 79.69,63.34 82.87,63.34 83.03,63.18 83.03,62.71 IC4.16
!X_MPD!  (via drill 0.3)
  Top 0.152: v71.28,39.05 68.58,36.35 68.58,32.38 68.42,32.23 67.79,32.23 67.31,32.7 66.83,32.7 U$2.22 | v83.19,40.48 88.58,45.88 90.65,45.88 95.25,50.48 95.25,63.02 IC5.15
  Bottom 0.152: v71.28,39.05 72.39,40.16 79.69,40.16 80.01,40.48 v83.19,40.48
!X_REF!  (via drill 0.3)
  Top 0.152: v75.72,26.35 75.72,27.3 U$2.52 | v115.25,29.05 115.25,47.94 101.28,61.91 97.95,61.91 97.31,62.55 97.31,63.02 IC5.18
  Bottom 0.152: v75.72,26.35 75.88,26.51 109.38,26.51 111.92,29.05 v115.25,29.05
!X_RST!  (via drill 0.3)
  Top 0.152: v74.45,30.8 74.45,27.46 U$2.49 | v78.58,45.56 79.38,45.56 83.66,49.85 83.66,62.55 IC4.17
  Route15 0.152: v74.45,30.8 74.45,31.59 75.41,32.54 75.41,39.85 78.58,43.02 v78.58,45.56
!X_S4!  (via drill 0.3)
  Top 0.152: v71.28,36.67 71.28,32.7 72.55,31.43 72.55,27.46 U$2.44 | v68.74,39.21 68.74,40.32 67.94,41.12 67.94,41.59 61.28,48.26 61.28,53.82 v54.93,60.17 | v39.21,61.28 39.21,62.39 39.05,62.55 IC1.12
  Route2 0.152: v68.74,39.21 v71.28,36.67
  Bottom 0.152: v54.93,60.17 54.29,60.8 39.69,60.8 v39.21,61.28
!X_S5!  (via drill 0.3)
  Top 0.152: v68.1,30 67.63,29.53 66.83,29.53 U$2.30 | v69.37,61.28 69.37,62.39 69.53,62.55 IC3.17
  Route2 0.152: v68.1,30 66.2,31.91 66.2,48.74 65.41,49.53 65.41,59.05 67.63,61.28 v69.37,61.28
+4.3V
  Top 0.152: IC5.20 98.42,63.18 98.42,63.5 97.47,64.45 89.53,64.45 89.22,64.14 C5.1 89.22,63.98 87.95,62.71 85.72,62.71 IC4.20 85.57,62.71 85.57,63.18 84.77,63.98 76.83,63.98 C3.1 76.68,63.82 75.56,62.71 71.75,62.71 | D2.C 34.92,64.14 C1.1 34.92,63.98 43.18,63.98 44.45,62.71 | 44.45,62.71 47.62,62.71 48.9,63.98 | 44.45,62.71 44.29,62.71 IC1.20 | 58.42,62.71 60.96,62.71 62.23,63.98 | 58.42,62.71 58.26,62.71 IC2.20 | 71.75,62.71 71.6,62.71 IC3.20 | 62.23,63.98 70.48,63.98 71.75,62.71 | 62.23,63.98 C4.1 | 48.9,63.98 57.15,63.98 58.42,62.71 | 48.9,63.98 C2.1
+5V  (via drill 0.3)
  Top 0.305: 10.48,25.72 7.3,25.72 6.27,24.69 | 10.48,25.72 13.18,25.72 14.29,26.83 14.29,27.3 U$5.3 | 6.27,24.69 4.45,22.86 C30.+ | 10.48,25.72 v10.48,23.81 | v109.86,89.53 U$19.44 100.33,80.17 99.85,80.17 95.57,84.45 73.03,84.45 v65.72,91.76 53.98,80.01 U$19.26 54.13,80.01 50.32,76.2 16.03,76.2 15.95,76.12 | 15.95,76.12 20.8,71.28 20.8,67.94 D2.A 18.73,65.72 13.34,65.72 12.38,64.77 12.38,64.14 U$4.3 12.38,63.98 12.38,63.66 13.18,62.87 13.18,61.59 U$4.5 13.18,61.44 13.18,60.96 12.86,60.64 11.27,60.64 5.87,55.24 C27.+ 4.29,55.24 1.11,52.07 1.11,29.84 6.27,24.69 | 15.95,76.12 10.32,81.76 9.37,81.76 USBPOWER.1
  Bottom 0.305: JTAG5V.1 70.96,13.81 47.78,13.81 46.35,12.38 46.35,10.79 23.5,10.79 v10.48,23.81 | v109.86,89.53 109.86,93.82 110.17,93.82 111.6,95.25 111.6,96.84 U$1.P$37 | v65.72,91.76 65.88,91.76 65.88,96.84 U$1.P$28
B1  (via drill 0.3)
  Top 0.152: U$19.1 26.51,72.55 35.08,72.55 38.89,68.74 38.89,68.26 IC1.9 | v25.08,77.15 27.78,77.15 30.32,79.69 30.32,80.01 36.51,86.2 36.51,90.49 35.56,91.44 35.56,96.84 U$1.P$1
  Bottom 0.152: v25.08,77.15 25.08,74.93 U$19.1
B2  (via drill 0.3)
  Top 0.152: v39.53,69.53 39.53,68.26 IC1.8
  Bottom 0.152: v39.53,69.53 35.56,73.5 29.21,73.5 27.78,74.93 27.78,78.9 | 27.78,78.9 25.24,78.9 U$19.2 | 27.78,78.9 27.78,80.49 28.73,81.44 30.16,81.44 35.08,86.36 35.4,86.36 35.4,96.84 U$1.P$16
B3  (via drill 0.3)
  Top 0.152: v37.15,67.31 39.85,67.31 40.16,67.63 40.16,68.1 IC1.7 | v35.88,89.85 35.88,87.15 29.84,81.12 27.78,81.12 U$19.4
  Bottom 0.152: v37.15,67.31 36.51,66.67 30.64,66.67 23.02,74.3 23.02,81.12 25.56,81.12 U$19.4 | v35.88,89.85 37.94,89.85 37.94,96.84 U$1.P$17
B4  (via drill 0.3)
  Top 0.152: U$19.5 31.27,72.87 36.99,72.87 40.8,69.06 40.8,68.26 IC1.6 | v38.58,90.96 40.48,92.87 40.48,96.84 U$1.P$3
  Bottom 0.152: v38.58,90.96 38.58,87.95 37.47,87.95 30.64,81.12 28.89,81.12 28.1,80.33 28.1,75.09 29.05,75.09 U$19.5
B5  (via drill 0.3)
  Top 0.152: v41.59,69.53 41.59,68.26 IC1.5 | v27.15,78.42 27.62,78.42 U$19.6
  Bottom 0.152: v41.59,69.53 41.12,69.06 31.75,69.06 26.99,73.82 26.35,73.82 25.56,74.61 25.56,78.42 v27.15,78.42 | U$19.6 30,80.01 31.11,81.12 32.23,81.12 39.21,88.11 40.48,88.11 40.48,96.84 U$1.P$18
B6  (via drill 0.3)
  Top 0.152: U$19.7 33.18,73.5 38.42,73.5 42.23,69.69 42.23,68.26 IC1.4 | v35.56,80.33 43.02,87.79 43.02,96.84 U$1.P$4
  Bottom 0.152: v35.56,80.33 35.56,76.04 32.86,76.04 U$19.7
B7  (via drill 0.3)
  Top 0.152: v38.1,74.77 39.05,73.82 39.53,73.82 44.61,68.74 44.61,67.63 44.29,67.31 43.34,67.31 43.02,67.63 43.02,68.1 IC1.3 | v36.04,77.15 34.61,77.15 U$19.8
  Bottom 0.152: v38.1,74.77 38.1,76.52 36.67,76.52 v36.04,77.15 | U$19.8 39.53,87.79 43.02,87.79 43.02,96.84 U$1.P$19
B8  (via drill 0.3)
  Top 0.152: U$19.9 35.4,73.82 38.58,73.82 43.5,68.9 43.5,68.26 IC1.2 | v36.83,77.15 37.94,78.26 37.94,80.01 45.56,87.63 45.56,96.84 U$1.P$5
  Route2 0.152: v36.83,77.15 34.61,74.93 U$19.9
B9  (via drill 0.3)
  Top 0.152: v51.91,70.01 52.7,70.01 52.86,69.85 52.86,68.26 IC2.9
  Bottom 0.152: v51.91,70.01 51.59,70.33 39.21,70.33 35.72,73.82 31.43,73.82 30.64,74.61 30.64,78.9 33.18,78.9 U$19.10 41.75,87.47 45.56,87.47 45.56,96.84 U$1.P$20
B10  (via drill 0.3)
  Top 0.152: v43.02,71.6 51.59,71.6 53.5,69.69 53.5,68.26 IC2.8 | v40.48,81.6 48.1,89.22 48.1,96.84 U$1.P$6
  Route2 0.152: v40.48,81.6 40.48,78.74 36.83,75.09 U$19.11
  Bottom 0.152: v43.02,71.6 40.8,73.82 37.94,73.82 U$19.11
B11  (via drill 0.3)
  Top 0.152: v51.59,72.07 54.13,69.53 54.13,68.26 IC2.7
  Bottom 0.152: v51.59,72.07 51.12,72.55 47.94,72.55 45.56,74.93 45.56,78.58 44.45,78.58 43.02,80.01 43.02,81.12 | 43.02,81.12 37.94,81.12 U$19.12 | 43.02,81.12 44.93,83.03 48.1,83.03 48.1,96.84 U$1.P$21
B12  (via drill 0.3)
  Top 0.152: U$19.13 41.43,72.87 51.59,72.87 54.77,69.69 54.77,68.26 IC2.6 | v40.01,77.15 41.12,77.15 43.02,79.06 43.02,80.01 50.96,87.95 50.96,90.01 50.8,90.17 50.8,96.84 U$1.P$7
  Bottom 0.152: v40.01,77.15 40.01,74.93 U$19.13
B13  (via drill 0.3)
  Top 0.152: v48.42,71.12 52.23,67.31 55.09,67.31 55.56,67.79 55.56,68.1 IC2.5 | 39.53,79.85 v41.27,78.11 | 39.53,79.85 v49.05,89.38 | 39.53,79.85 U$19.14
  Bottom 0.152: v48.42,71.12 45.72,73.82 44.13,73.82 43.02,74.93 43.02,78.11 v41.27,78.11 | v49.05,89.38 49.85,90.17 50.64,90.17 50.64,96.84 U$1.P$22
B14  (via drill 0.3)
  Top 0.152: U$19.15 43.34,73.5 51.44,73.5 56.2,68.74 56.2,68.26 IC2.4 | v42.55,77.15 43.02,77.15 45.56,79.69 45.56,80.01 51.28,85.72 51.28,90.49 53.18,92.39 53.18,96.84 U$1.P$8
  Bottom 0.152: v42.55,77.15 42.55,74.93 U$19.15
B15  (via drill 0.3)
  Top 0.152: v56.2,69.53 56.83,68.9 56.83,68.26 IC2.3 | v50.48,89.69 50.48,88.58 U$19.16
  Bottom 0.152: v56.2,69.53 55.09,70.64 44.77,70.64 40.48,74.93 40.48,80.01 U$19.16 | v50.48,89.69 53.18,89.69 53.18,96.84 U$1.P$23
B16  (via drill 0.3)
  Top 0.152: U$19.17 45.56,73.82 52.7,73.82 57.47,69.06 57.47,68.26 IC2.2 | v45.09,77.15 45.56,77.15 48.1,79.69 48.1,80.01 55.72,87.63 55.72,96.84 U$1.P$9
  Bottom 0.152: v45.09,77.15 45.09,74.93 U$19.17
B17  (via drill 0.3)
  Top 0.152: v66.36,69.53 66.36,68.26 IC3.9
  Bottom 0.152: v66.36,69.53 62.71,73.18 49.85,73.18 48.1,74.93 48.1,78.58 46.04,78.58 45.09,79.53 | 45.09,79.53 44.61,80.01 U$19.18 | 45.09,79.53 55.72,90.17 55.72,96.84 U$1.P$24
B18  (via drill 0.3)
  Top 0.152: v64.45,67.94 65.09,67.31 66.52,67.31 66.83,67.63 66.83,68.1 IC3.8 | v47.62,77.15 50.64,77.15 53.18,79.69 53.18,82.55 58.26,87.63 58.26,96.84 U$1.P$10
  Bottom 0.152: v64.45,67.94 63.98,68.42 58.1,68.42 53.66,72.87 49.05,72.87 U$19.19 47.62,74.93 v47.62,77.15
B19  (via drill 0.3)
  Top 0.152: v67.47,69.53 67.47,68.26 IC3.7 | v57.15,91.92 57.15,87.31 50.64,80.8 v50.64,78.11
  Bottom 0.152: v67.47,69.53 67.47,73.82 51.75,73.82 50.64,74.93 v50.64,78.11 50.64,78.42 48.74,78.42 47.15,80.01 U$19.20 | v57.15,91.92 57.94,92.71 58.26,92.71 58.26,96.84 U$1.P$25
B20  (via drill 0.3)
  Top 0.152: v68.26,69.53 68.26,68.26 IC3.6 | v60.8,92.71 60.8,96.84 U$1.P$11 | v53.02,77.95 52.7,77.95 49.69,74.93 U$19.21
  Bottom 0.152: v68.26,69.53 67.79,69.06 67.15,69.06 66.83,69.37 66.83,73.5 50.96,73.5 U$19.21 | v60.8,92.71 53.18,85.09 53.18,77.95 v53.02,77.95
B21  (via drill 0.3)
  Top 0.152: v69.06,69.53 69.06,68.26 IC3.5 | v68.1,70.48 65.56,70.48 59.37,76.68 v53.02,76.68
  Bottom 0.152: v68.1,70.48 v69.06,69.53 | 49.69,80.01 v53.02,76.68 | 49.69,80.01 49.69,83.66 59.53,93.5 60.8,93.5 60.8,96.84 U$1.P$26 | 49.69,80.01 U$19.22
B22  (via drill 0.3)
  Top 0.152: 52.86,74.61 52.55,74.93 U$19.23 | 52.86,74.61 57.78,69.69 61.44,69.69 64.14,66.99 68.74,66.99 69.53,67.79 69.53,68.1 IC3.4 | v62.55,91.76 63.34,92.55 63.34,96.84 U$1.P$12 | v56.52,76.04 54.29,76.04 52.86,74.61
  Bottom 0.152: v62.55,91.76 62.55,76.36 56.83,76.36 v56.52,76.04
B23  (via drill 0.3)
  Top 0.152: v70.17,66.36 70.17,68.1 IC3.3
  Bottom 0.152: v70.17,66.36 70.17,74.14 68.42,74.14 63.5,79.06 63.5,93.19 | 63.5,93.19 63.5,96.84 U$1.P$27 | U$19.24 52.07,85.57 52.86,85.57 60.48,93.19 63.5,93.19
B24  (via drill 0.3)
  Top 0.152: U$19.25 59.53,70.01 69.37,70.01 70.8,68.58 70.8,68.26 IC3.2 | v58.26,86.68 65.88,94.3 65.88,96.84 U$1.P$13
  Bottom 0.152: v58.26,86.68 53.5,81.92 53.5,74.93 U$19.25
B25  (via drill 0.3)
  Top 0.152: v62.39,75.41 64.29,73.5 75.56,73.5 80.49,68.58 80.49,68.1 IC4.9 | v63.02,90.65 64.93,92.55 65.56,92.55 68.42,95.41 68.42,96.84 U$1.P$14
  Bottom 0.152: 61.75,76.04 v62.39,75.41 | 61.75,76.04 58.58,76.04 57.47,74.93 U$19.27 | v63.02,90.65 63.02,76.04 61.75,76.04
B26  (via drill 0.3)
  Top 0.152: IC4.8 81.12,68.1 81.12,68.58 75.88,73.82 64.77,73.82 59.69,78.9 58.26,78.9 U$19.28 66.04,88.9 v66.04,90.17
  Bottom 0.152: v66.04,90.17 68.1,92.23 68.42,92.23 68.42,96.84 U$1.P$29
B27  (via drill 0.3)
  Top 0.152: v66.99,74.3 68.74,74.3 | 68.74,74.3 76.04,74.3 81.76,68.58 81.76,68.1 IC4.7 | v70.96,93.82 70.96,96.84 U$1.P$15 | 68.74,74.3 v68.74,74.61
  Bottom 0.152: v66.99,74.3 66.36,74.93 U$19.29 | v70.96,93.82 70.96,82.87 70.64,82.87 68.74,80.96 v68.74,74.61
B28  (via drill 0.3)
  Top 0.152: IC4.6 82.39,68.1 82.39,68.58 75.88,75.09 64.61,75.09 U$19.30 v68.1,88.42
  Bottom 0.152: v68.1,88.42 68.74,88.42 68.74,92.39 70.64,94.3 70.96,94.3 70.96,96.84 U$1.P$30
B29  (via drill 0.3)
  Top 0.152: U$19.32 83.19,78.11 83.19,68.1 IC4.5 | v96.36,88.74 v96.36,93.82
  Bottom 0.152: v96.36,93.82 96.36,96.84 U$1.P$31 | v96.36,88.74 96.36,88.42 94.77,86.84 94.77,81.44 86.52,81.44 U$19.32
B30  (via drill 0.3)
  Top 0.152: U$19.33 83.82,71.12 83.82,68.1 IC4.4 | v95.73,85.25 98.9,88.42 98.9,96.84 U$1.P$39
  Bottom 0.152: v95.73,85.25 95.73,81.12 89.85,81.12 88.74,80.01 88.74,74.93 U$19.33
B31
  Top 0.152: U$19.34 88.74,78.9 88.74,74.61 84.45,70.33 84.45,68.1 IC4.3
  Bottom 0.152: U$19.34 86.52,78.9 83.98,78.9 83.98,80.33 85.41,81.76 94.46,81.76 94.46,87.63 97.79,90.96 98.9,90.96 98.9,96.84 U$1.P$32
B32  (via drill 0.3)
  Top 0.152: U$19.35 85.09,69.85 85.09,68.1 IC4.2 | v101.44,93.82 101.44,96.84 U$1.P$40
  Bottom 0.152: v101.44,93.82 101.44,91.76 100.65,91.76 96.36,87.47 96.36,76.36 91.6,76.36 U$19.35
B33  (via drill 0.3)
  Top 0.152: 90.65,79.53 91.28,78.9 91.28,74.93 94.61,71.6 94.61,68.58 IC5.7 | v95.25,83.82 94.93,83.82 90.65,79.53 | 90.65,79.53 U$19.36
  Bottom 0.152: v95.25,83.82 95.25,86.84 99.22,90.81 99.22,92.39 101.12,94.3 101.44,94.3 101.44,96.84 U$1.P$33
B34  (via drill 0.3)
  Top 0.152: U$19.37 95.25,72.39 95.25,68.58 IC5.6 | v102.87,92.71 102.87,95.73 103.98,96.84 U$1.P$41
  Bottom 0.152: U$19.37 93.82,76.04 96.52,76.04 99.22,78.74 99.22,89.85 100.01,89.85 v102.87,92.71
B35  (via drill 0.3)
  Top 0.152: 93.19,79.53 93.82,78.9 93.82,74.93 95.89,72.87 95.89,68.58 IC5.5 | v103.66,82.07 103.66,81.76 100.81,78.9 99.85,78.9 98.9,79.85 98.9,80.33 98.11,81.12 94.77,81.12 93.19,79.53 | 93.19,79.53 U$19.38
  Bottom 0.152: v103.66,82.07 103.98,82.07 103.98,96.84 U$1.P$34
B36  (via drill 0.3)
  Top 0.152: U$19.39 96.52,73.66 96.52,68.58 IC5.4 | v106.52,91.44 106.52,96.84 U$1.P$42
  Bottom 0.152: U$19.39 96.04,75.72 97.16,75.72 100.33,78.9 101.28,78.9 106.52,84.14 v106.52,91.44
B37  (via drill 0.3)
  Top 0.152: U$19.41 97.31,74.45 97.31,68.58 IC5.3 | v108.74,91.12 108.74,96.52 109.06,96.84 U$1.P$43
  Bottom 0.152: U$19.41 108.74,85.88 v108.74,91.12
B38  (via drill 0.3)
  Top 0.152: 98.9,75.25 98.9,78.9 U$19.42 | 98.9,75.25 98.9,74.61 97.95,73.66 97.95,68.58 IC5.2 | 98.9,75.25 v109.06,85.41
  Bottom 0.152: v109.06,85.41 109.22,85.41 109.22,96.84 U$1.P$36
DOUT1_N
  Top 0.152: X1.3 98.68,10.73 98.66,10.75 101.42,13.46 arc90 101.54,13.58 101.54,24.59 U$12.8
DOUT1_P
  Top 0.152: X1.6 97.2,10.97 98.44,10.97 101.07,13.59 101.07,24.64 U$12.7
DOUT2_N
  Top 0.152: U$12.5 99.7,17.34 92.52,10.16 92.52,8.95 93.22,8.26 93.98,8.26 X1.7
DOUT2_P
  Top 0.152: U$12.6 100.35,17.4 100.33,17.37 100.33,15.4 arc-90 100.08,15.14 arc-90 99.82,15.4 99.82,15.49 arc-90 99.79,15.53 99.79,16.29 arc90 99.57,16.51 99.47,16.51 98.9,15.88 93.71,10.75 93.71,9.51 X1.8
EN_1V0
  Top 0.305: U$5.5 13.49,31.43 10.16,34.77 10.16,43.34 9.21,44.29 9.21,45.56 8.89,45.88 8.41,45.88 U$6.1 8.26,46.04 7.94,46.35 3.81,46.35 R27.1
GND  (via drill 0.3)  (2 unrouted)
  Top 0.152: 36.67,68.1 36.2,68.1 34.92,66.83 C1.2 | 36.67,68.1 38.26,68.1 IC1.10 | 48.9,66.83 62.23,66.83 C4.2 62.23,66.67 69.06,66.67 69.85,65.88 75.88,65.88 76.68,66.67 C3.2 76.83,66.83 77.95,67.94 79.85,67.94 IC4.10 80.01,67.94 80.01,67.63 80.8,66.83 89.22,66.83 | 36.67,68.1 36.67,66.99 36.83,66.83 48.9,66.83 | 48.9,66.83 C2.2 | 89.22,66.83 90.81,68.42 92.71,68.42 IC5.10 92.87,68.42 92.87,67.94 96.04,64.77 97.79,64.77 100.33,62.23 | 89.22,66.83 C5.2 | 107.31,66.67 107.31,69.85 R23.2 101.28,75.72 101.12,75.72 | 105.25,62.23 105.89,62.23 R21.2 107.31,63.5 107.31,66.67 | 105.25,62.23 100.33,62.23 | 100.33,62.23 98.27,62.23 97.95,62.55 97.95,63.02 IC5.19 | 105.25,62.23 R20.2 | 107.31,66.67 R22.2 | C34.2 8.73,49.53 9.21,49.53 14.61,44.13 C46.2 14.61,43.66 | R7.1 12.7,35.08 11.43,36.35 11.43,40.48 14.61,43.66 | 23.02,37.15 22.7,37.47 C40.2 23.02,37.15 | 23.02,37.15 24.61,35.56 26.67,35.56 U$7.41 | 42.55,23.5 42.55,27.3 C35.2 | 42.55,23.5 42.55,22.86 C41.2 42.55,23.5 | C39.2 22.7,26.35 23.97,25.08 26.67,25.08 U$7.54 26.83,24.92 28.26,23.5 42.55,23.5 | U$7.52 26.67,26.51 22.7,26.51 C39.2 | 22.7,31.43 26.67,31.43 U$7.46 | 22.7,31.43 21.43,30.16 21.43,27.62 22.54,26.51 C39.2 | 22.07,36.2 20.8,34.92 20.8,33.34 21.27,32.86 | 22.07,36.2 23.02,37.15 | 22.7,31.43 21.27,32.86 | 22.07,36.2 14.61,43.66 | C19.2 v57.63,41.27 58.1,41.75 58.1,44.77 56.52,46.35 | 56.52,46.35 56.52,50.8 C6.2 54.93,50.8 43.66,62.07 43.66,62.55 IC1.19 43.5,62.71 43.5,63.02 43.02,63.5 38.26,63.5 37.31,62.55 37.31,61.75 | 56.52,46.35 C25.1 | 37.31,61.75 37.31,59.21 U$9.8 | C38.2 29.21,62.87 30.32,61.75 37.31,61.75 | 99.06,52.7 v99.06,55.09 99.06,56.52 R30.1
  Top 0.152: 99.06,48.26 99.06,44.45 R34.1 R33.1 | R33.1 97.79,41.75 90.01,41.75 C15.2 | R33.1 | 99.06,48.26 99.06,52.7 | 99.06,52.7 R29.2 | 99.06,48.26 R31.1 | U$5.1 12.54,27.46 11.27,27.46 v10,28.73 8.89,29.84 C32.- 8.73,29.84 8.73,32.7 5.71,35.72 5.71,39.21 R28.1 | R28.1 5.24,42.07 8.26,45.09 U$6.2 | R28.1 | 26.67,19.21 26.67,21.59 C36.2 | 26.67,19.21 26.67,18.26 J1.3 | 20.16,19.21 26.67,19.21 | 20.16,19.21 19.21,18.26 J1.6 19.05,18.1 18.26,18.1 16.67,16.51 11.27,16.51 J1.GND1 11.11,16.51 8.41,16.51 BOOT_SW.3 8.41,16.67 8.41,22.86 C30.- | 82.55,19.53 82.87,19.53 C24.2 82.55,19.53 | 82.55,19.53 79.38,19.53 | 67.94,19.53 64.14,19.53 C9.2 | 67.94,19.53 71.75,19.53 | 67.94,19.53 C20.2 | 71.75,19.53 75.56,19.53 | 71.75,19.53 C10.2 | 75.56,19.53 79.38,19.53 | 79.38,19.53 C11.2 | 75.56,19.53 C16.2 | C27.- 13.18,55.24 v14.29,56.36 15.4,57.47 15.4,62.23 14.29,63.34 14.29,63.98 U$4.1 | 87,21.91 87,18.41 C18.2 86.84,18.41 86.84,13.34 80.96,7.46 80.96,3.81 RESET_SW.4 | 87,26.35 87,30.8 C13.2 | 87,26.35 87,21.91 | 87,21.91 C12.2 | 87,26.35 C17.2 | R5.1 v5.87,73.18 5.87,75.25 9.21,78.58 USBPOWER.5 | 98.9,34.45 98.9,30.64 U$12.13 | 98.9,34.45 97.16,36.2 R18.1 R19.1 | 44.93,33.66 44.13,32.86 43.18,32.86 U$8.3 | 44.93,33.66 44.93,38.58 45.09,38.73 C37.2 | C7.2 64.14,51.59 v65.88,49.85 67.47,48.26 U1.2 | C14.2 80.01,53.18 v78.74,54.45 77.63,55.56 76.99,55.56 76.52,55.09 76.52,54.61 SJ1.1 | C43.2 114.78,13.65 114.78,10.48 C42.2 113.98,10.48 112.24,8.73 105.57,8.73 105.41,8.57 X1.S@2 | U$11.2 v113.67,20.8 113.67,21.91 114.3,22.54 C44.1 | U$12.9 101.76,30.64 103.82,30.64 103.98,30.8 C45.2 104.14,30.96 108.11,30.96 | v25.72,45.88 26.67,45.88 U$7.28
  Top 0.152: v39.69,29.05 38.26,29.05 U$7.6 | U$7.12 38.26,33.97 v39.69,33.97 41.75,31.91 46.2,31.91 46.67,32.38 46.67,33.02 46.04,33.66 44.93,33.66 | v57.63,61.28 57.63,62.55 IC2.19 | v52.39,69.53 52.39,68.26 IC2.10 | v65.56,69.53 65.56,68.26 IC3.10 | IC3.19 70.96,62.55 70.96,61.91 v71.6,61.28 76.2,61.28 78.58,63.66 84.45,63.66 84.93,63.18 84.93,62.71 IC4.19 | v56.52,23.65 56.52,22.23 C21.2 | C26.2 76.2,4.45 80.8,9.05 80.8,10.16 RESET_SW.3 80.96,10.32 83.03,12.38 83.03,13.49 U$3.3 83.03,13.65 83.03,14.13 82.55,14.61 82.55,19.53 | v56.52,37.62 56.52,36.2 C8.2 | v72.23,51.59 73.66,51.59 C23.2 | v12.7,69.06 R4.1 | v43.97,45.72 R9.1 | v32.7,51.44 31.27,51.44 U$9.15 | v28.26,59.21 26.67,59.21 U$10.4 | 108.11,30.96 108.43,30.96 GPIO.1 | J1.GND4 11.11,1.91 11.11,7.3 1.91,16.51 BOOT_SW.4 | XTAG.20 38.26,16.35 36.35,16.35 J1.GND2 | v39.69,1.91 38.58,1.91 J1.GND3 | v8.1,63.34 8.1,62.23 C29.- | 98.9,34.45 99.22,34.45 99.38,34.61 104.46,34.61 108.11,30.96 | v38.1,85.09 38.1,96.84 U$1.P$2 | U$19.43 101.12,75.72 | 101.12,75.72 111.6,86.2 111.6,96.84 U$1.P$44 | 21.27,32.86 20.16,31.75 20.16,19.21
  other vias: 74.3,34.92 74.3,36.83 76.2,36.83 76.2,34.92 76.2,33.02 74.3,33.02 72.39,33.02 72.39,34.92 72.39,36.83
  pour Route2: 0,85.09 0,0 116.84,0 116.84,85.09
JTAG_DN0
  Top 0.152: U$2.8 66.73,38.26 51.85,38.26 51.44,37.85 51.44,35.27 arc-90 51.09,34.92 50.8,34.92 arc90 50.48,34.61 arc90 50.8,34.29 51.12,34.29 arc-90 51.44,33.97 arc-90 51.12,33.66 50.8,33.66 arc90 50.48,33.34 arc90 50.8,33.02 51.12,33.02 arc-90 51.44,32.7 51.44,10.64 arc90 51.47,10.6 52.55,9.53 XTAG.14
JTAG_DN1
  Top 0.152: U$2.7 50,38.73 48.86,37.59 48.86,10.67 47.72,9.53 XTAG.18
JTAG_UP0
  Top 0.152: R12.2 56.2,31.59 54.29,31.59 52.86,30.16 52.86,19.59 53.82,18.64 58.36,18.64 59.15,17.84 59.15,10.89 XTAG.10
JTAG_UP1
  Top 0.152: R13.2 55.57,26.51 54.26,26.51 54.13,26.38 54.13,20.51 55.05,19.59 60.61,19.59 61.72,18.48 61.72,10.38 62.58,9.53 XTAG.6
LED0  (via drill 0.3)
  Top 0.152: v82.39,42.7 80.96,41.27 80.96,40.96 81.12,40.8 81.76,40.8 U$2.95 | v109.38,55.09 114.62,60.33 DBG0.A
  Bottom 0.152: v82.39,42.7 83.34,43.66 97.95,43.66 v109.38,55.09
LED1  (via drill 0.3)
  Top 0.152: v82.39,43.5 81.92,43.02 80.96,43.02 80.49,42.55 U$2.97 | v112.87,61.75 114.62,63.5 DBG1.A
  Bottom 0.152: v82.39,43.5 83.19,44.29 91.92,44.29 109.38,61.75 v112.87,61.75
LED2  (via drill 0.3)
  Top 0.152: v81.44,43.5 80.64,43.5 80.17,43.02 80.17,42.55 U$2.98 | v112.87,64.93 114.62,66.67 DBG2.A
  Bottom 0.152: v81.44,43.5 82.55,44.61 91.76,44.61 112.08,64.93 v112.87,64.93
LED3  (via drill 0.3)
  Top 0.152: v79.69,43.5 79.69,42.55 U$2.99 | v112.87,68.1 114.62,69.85 DBG3.A
  Bottom 0.152: v79.69,43.5 81.12,44.93 89.69,44.93 v112.87,68.1
LNK_IN0
  Top 0.152: U$12.14 98.4,31.78 R18.2 97.16,34.29 96.52,34.92 92.08,34.92 89.47,37.52 U$2.87
LNK_IN1
  Top 0.152: U$12.15 97.75,31.15 97.16,31.75 93.98,31.75 93.66,32.07 93.66,33.19 R19.2 93.97,33.34 92.36,33.34 91.95,33.75 91.95,34.48 89.7,36.73 U$2.85
LNK_OUT0
  Top 0.152: 100.35,34.05 R17.2 100.35,33.48 U$12.11
LNK_OUT1
  Top 0.152: U$12.10 101,31.47 101.28,31.75 101.6,31.75 102.87,33.02 103.02,33.02 R16.2
N$1
  Top 0.152: 86.84,49.69 89.22,52.07 C22.1 | 86.84,49.69 81.92,44.77 80.17,44.77 78.58,43.18 78.58,42.55 U$2.102 | 86.84,49.69 89.53,46.99 R1.1
N$2
  Top 0.152: U$2.124 69.69,48.22 U1.3
N$3
  Top 0.152: 78.11,45.09 78.11,53.82 77.31,54.61 SJ1.2 | 78.11,45.09 78.11,42.55 U$2.103 | 78.11,45.09 81.44,45.09 86.84,50.48 86.84,52.07 C22.2
N$4  (via drill 0.3)
  Top 0.152: v14.13,60.64 14.13,61.44 U$4.6 | C28.2 v9.53,66.36
  Bottom 0.152: v14.13,60.64 9.53,65.25 v9.53,66.36
N$5  (via drill 0.3)
  Top 0.152: 76.83,12.7 81.6,12.7 81.92,13.02 81.92,13.18 82.23,13.49 U$3.2 | v70.33,13.18 76.36,13.18 76.83,12.7 | 76.83,12.7 R2.1
  Bottom 0.152: XTAG.15 51.28,13.18 v70.33,13.18
N$6
  Top 0.152: U$11.4 112.71,17.14 112.71,14.29 112.08,13.65 C43.1
N$7  (via drill 0.3)
  Top 0.305: L1.2 12.7,57.78 14.92,60.01 14.92,62.07 13.34,63.66 13.34,63.98 U$4.2 13.18,64.14 13.65,64.61 v13.65,65.09 | v9.53,69.22 C28.1
  Bottom 0.305: v13.65,65.09 v9.53,69.22
N$8
  Top 0.305: C31.2 8.89,35.24 12.54,31.59 12.54,29.84 U$5.6
N$9
  Top 0.305: U$4.4 12.22,61.59 12.22,62.87 11.43,63.66 11.43,69.22 12.7,70.48 R4.2 R3.1
N$10
  Top 0.152: LED1.C 3.33,67.94 3.33,70.96 3.17,71.12 R5.2
N$11
  Top 0.305: 13.49,27.62 U$5.2 13.49,27.46 | 13.49,27.62 13.97,28.1 14.92,28.1 15.24,27.78 15.24,26.83 12.06,23.65 L2.2 | C31.1 8.89,38.89 7.62,37.62 7.62,34.45 11.75,30.32 11.75,29.37 13.49,27.62
N$12
  Top 0.305: 14.29,34.92 14.29,35.56 12.7,37.15 R7.2 | 14.29,34.92 14.29,29.84 U$5.4 | 14.29,34.92 16.51,37.15 R6.1
N$13
  Top 0.305: U$6.4 10.79,44.29 11.27,44.29 11.59,44.61 11.59,46.51 9.84,48.26 7.14,48.26 5.87,49.53 C34.1
N$14  (via drill 0.3)
  Top 0.152: v25.72,36.67 26.04,36.99 26.67,36.99 U$7.39 | U$7.15 38.26,36.35 38.42,36.51 v39.69,36.51 40.16,36.04 40.16,34.45 42.39,32.23 43.97,32.23 44.45,32.7 45.72,32.7 U$8.4
  Bottom 0.152: v25.72,36.67 25.88,36.51 v39.69,36.51
N$15
  Top 0.152: U$7.37 26.67,38.73 25.56,38.73 22.54,41.75 R8.2
N$16
  Top 0.152: U$9.3 37.15,52.86 36.2,52.86 32.38,56.67 32.38,59.53 32.23,59.69 21.91,59.69 21.43,59.21 U$10.5
N$17  (via drill 0.3)
  Top 0.152: v39.69,40.64 38.58,39.53 38.26,39.53 U$7.19 | v43.18,44.13 43.18,45.09 42.55,45.72 R9.2
  Bottom 0.152: v43.18,44.13 v39.69,40.64
N$18
  Top 0.152: U$9.6 37.15,56.67 36.2,56.67 31.43,61.44 27.78,61.44 26.04,63.18 26.04,63.82 25.88,63.98 23.97,63.98 23.18,63.18 23.18,61.91 20.95,59.69 20,59.69 20,58.74 20.32,58.42 24.29,58.42 26.04,56.67 26.51,56.67 U$10.2
N$19
  Top 0.152: U$9.10 31.11,57.78 26.67,57.78 U$10.3
N$20
  Top 0.152: U$9.13 31.11,54.13 29.53,54.13 27.62,56.04 21.91,56.04 21.43,56.52 U$10.7
N$22
  Top 0.152: R12.1 62.42,34.96 62.42,36.07 63.88,37.52 U$2.10
N$23
  Top 0.152: R13.1 62.87,30.96 62.87,35.88 64.11,37.12 U$2.11
N$24
  Top 0.152: R23.1 DBG3.C
N$25
  Top 0.152: R22.1 DBG2.C
N$26
  Top 0.152: R21.1 DBG1.C
N$27
  Top 0.152: R20.1 DBG0.C
N$28
  Top 0.152: U$2.88 81.81,37.91 90.01,37.91 91.12,36.8 91.38,36.8 92.49,37.91 101.79,37.91 101.92,37.78 101.92,36.83 101.6,36.51 100.5,36.51 R17.1
N$29
  Top 0.152: U$2.89 102.65,38.32 103.5,37.47 R16.1
N$30  (via drill 0.3)
  Top 0.152: 16.67,62.87 16.67,57.78 L1.1 | C29.+ 3.33,62.23 5.4,64.29 5.4,67.94 LED1.A 5.56,67.94 6.99,69.37 6.99,70.33 8.41,71.75 16.99,71.75 17.14,71.6 17.14,69.69 16.67,69.22 | R3.2 15.88,68.42 16.67,69.22 | v16.67,63.98 16.67,62.87 | 16.67,69.22 v16.67,66.36 | 16.67,62.87 SJ2.1
  Bottom 0.152: v16.67,66.36 v16.67,63.98
N$31
  Top 0.152: LED2.C 2.7,36.2 2.7,39.53 2.54,39.69 R28.2
N$32  (via drill 0.3)
  Top 0.152: LED2.A 4.76,36.2 v4.76,34.45 4.76,30.64 3.97,29.84 C32.+ | 16.67,29.21 16.67,34.29 16.51,34.45 | 16.67,29.21 16.03,28.57 16.03,23.65 L2.1 | 16.67,29.21 SJ3.1 | 16.51,34.45 v14.92,34.45 | 16.51,34.45 R6.2
  Bottom 0.152: v14.92,34.45 v4.76,34.45
N$33  (via drill 0.3)
  Top 0.152: v64.77,39.21 64.93,39.05 66.67,39.05 U$2.6 | v21.91,31.43 21.91,31.11 21.11,30.32 21.11,25.88 24.13,22.86 27.62,22.86 | 27.62,22.86 35.4,22.86 36.51,21.75 R15.1 | 27.62,22.86 27.62,17.46 22.23,12.06 8.41,12.06 BOOT_SW.1
  Bottom 0.152: BOOT_SW.2 1.91,12.06 8.26,12.06 BOOT_SW.1 | v64.77,39.21 64.29,39.69 56.2,39.69 54.29,37.78 39.21,37.78 35.56,41.43 23.34,41.43 21.91,40.01 v21.91,31.43
N$34  (via drill 0.3)
  Top 0.152: v64.61,34.13 64.61,33.02 66.04,31.59 66.67,31.59 U$2.25 | v101.76,36.04 102.55,35.24 104.46,35.24 104.62,35.4 104.62,37.31 102.39,39.53 100.81,39.53 100.65,39.69 100.65,51.75 101.6,52.7 R29.1 102.39,53.34 MEM_SEL.2
  Bottom 0.152: v64.61,34.13 65.56,35.08 69.06,35.08 70.17,36.2 82.23,36.2 83.19,37.15 100.65,37.15 v101.76,36.04
N$35  (via drill 0.3)
  Top 0.152: v71.28,38.26 68.9,35.88 68.9,32.23 67.79,31.11 66.83,31.11 U$2.26 | v99.38,42.55 99.38,42.86 100.33,43.81 100.33,55.24 100.97,55.88 | 100.97,55.88 101.6,56.52 R30.2 100.97,55.88 | 100.97,55.88 MEM_SEL.1
  Bottom 0.152: v71.28,38.26 72.07,39.05 95.89,39.05 v99.38,42.55
N$38
  Top 0.305: JTAG5V.2 XTAG.1
PBI0  (via drill 0.3)
  Top 0.152: v69.37,30.32 68.1,29.05 68.1,27.46 U$2.33 | v70.64,30.8 70.64,35.08 70.8,35.24 70.8,36.99 v72.07,38.26 | R31.2 104.14,48.26 PBI_ID.1
  Bottom 0.152: v69.37,30.32 69.85,30.8 v70.64,30.8 | v72.07,38.26 72.55,38.73 98.27,38.73 103.98,44.45 103.98,46.99 PBI_ID.1
PBI1  (via drill 0.3)
  Top 0.152: v78.9,28.57 79.22,28.26 79.22,27.46 U$2.61 | PBI_ID.2 R34.2
  Bottom 0.152: v78.9,28.57 79.38,28.1 110.49,28.1 111.76,29.37 114.14,29.37 115.09,30.32 115.09,43.5 106.36,43.5 PBI_ID.2
PBI2  (via drill 0.3)
  Top 0.152: v79.69,28.57 79.69,27.46 U$2.62 | 105.09,40.64 105.09,41.59 PBI_ID.3 | 105.09,40.64 v105.09,36.99 | 105.09,40.64 R33.2
  Bottom 0.152: v79.69,28.57 81.28,30.16 98.27,30.16 v105.09,36.99
QSPI_CLK  (via drill 0.3)
  Top 0.152: v68.26,30.8 68.1,30.8 67.63,30.32 66.83,30.32 U$2.28 | v23.81,38.58 21.59,40.8 21.43,40.8 20,42.23 20,57.15 20.64,57.78 21.27,57.78 U$10.6
  Route15 0.152: v68.26,30.8 66.36,32.7 65.09,32.7 v61.75,36.04
  Bottom 0.152: v61.75,36.04 61.59,35.88 55.09,35.88 54.93,35.72 24.92,35.72 23.81,36.83 v23.81,38.58
RIN1_N
  Top 0.152: U$12.1 97.12,24.7 97.12,17.05 91.03,10.95 91.03,8.16 93.89,5.3 99.47,5.3 100.74,6.57 100.74,7.59 X1.1
RIN1_P
  Top 0.152: U$12.2 97.75,17.08 91.4,10.73 91.4,8.32 93.98,5.74 99.31,5.74 99.69,6.12 X1.2
RIN2_N
  Top 0.152: U$12.4 99.05,17.37 92.16,10.48 92.16,8.57 94.23,6.5 95.38,6.5 95.63,6.76 95.63,8.13 96.65,8.89 97.35,8.89 X1.4
RIN2_P